# Altium PCB main_old.PcbDoc (part 1 of 15)
Units mil, origin at the board's own origin, x right, y up, seen from the top; angles counter-clockwise.
Board outline 8394.55 x 5164.44 mil, 7 copper layers (Top Layer 1, Layer 2, Layer 3, Unused, Layer 4_pow, Layer 5_gnd, Bottom 6+gnd), stack 46.112 mil thick; 363 components, 409 nets, 1750 pads, 991 vias.
Unrouted connection lines stored in the file: 1.
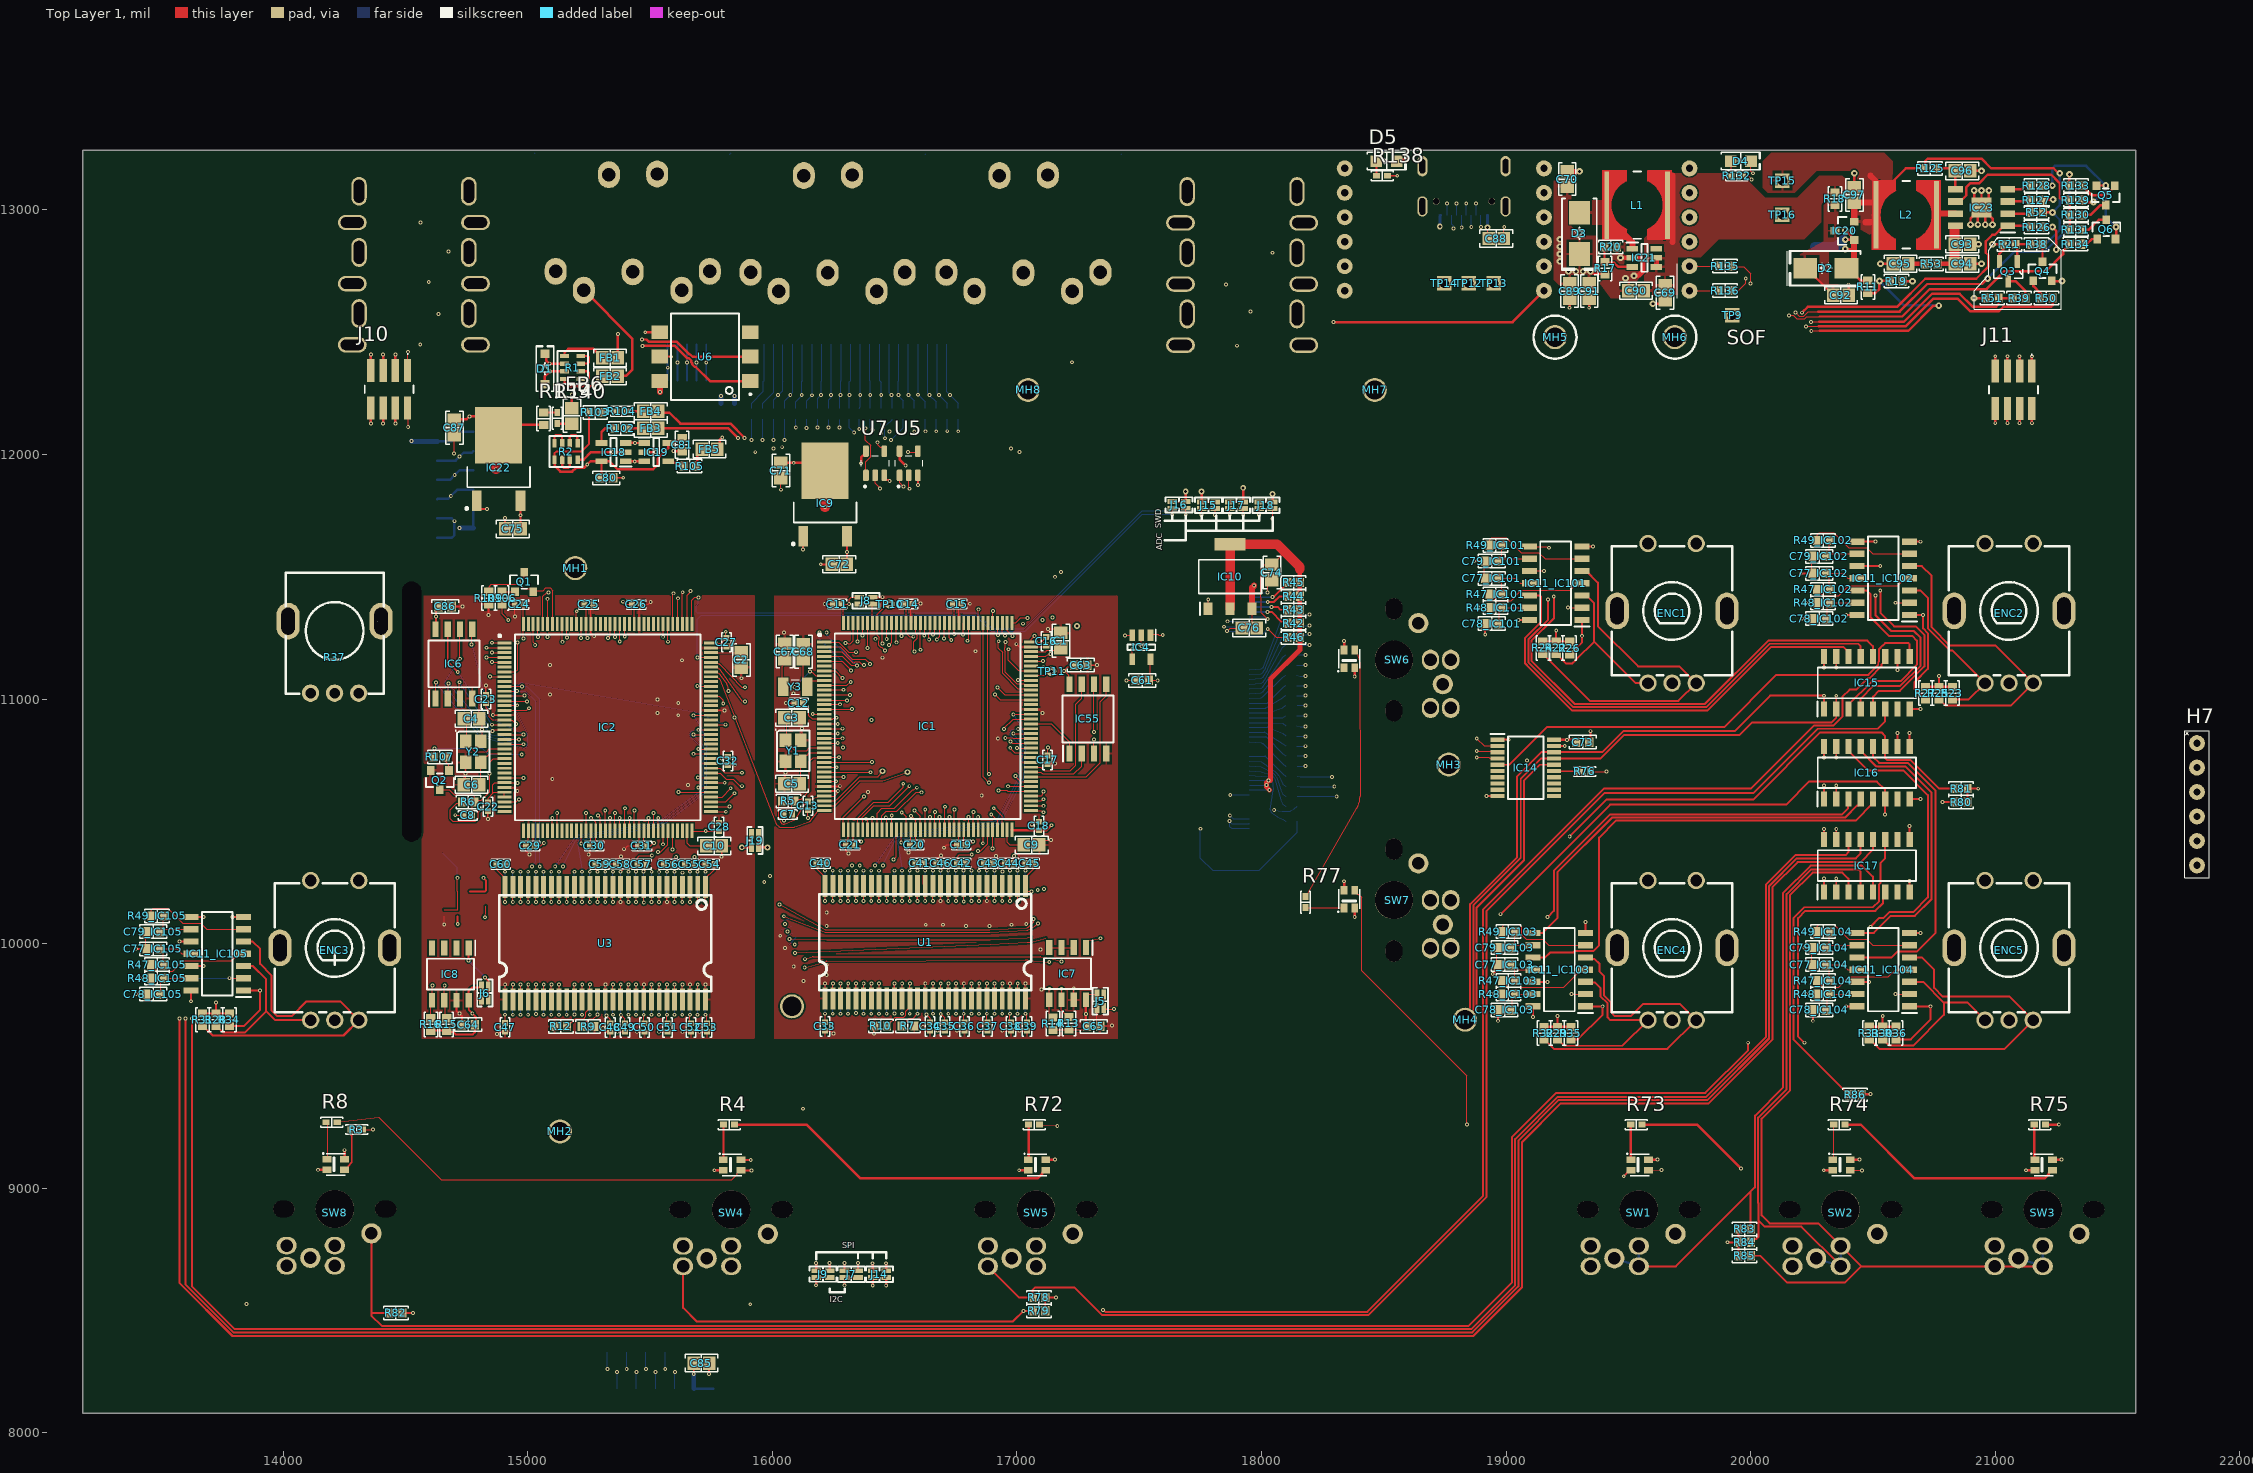
[diagram p0: Top Layer 1 view]
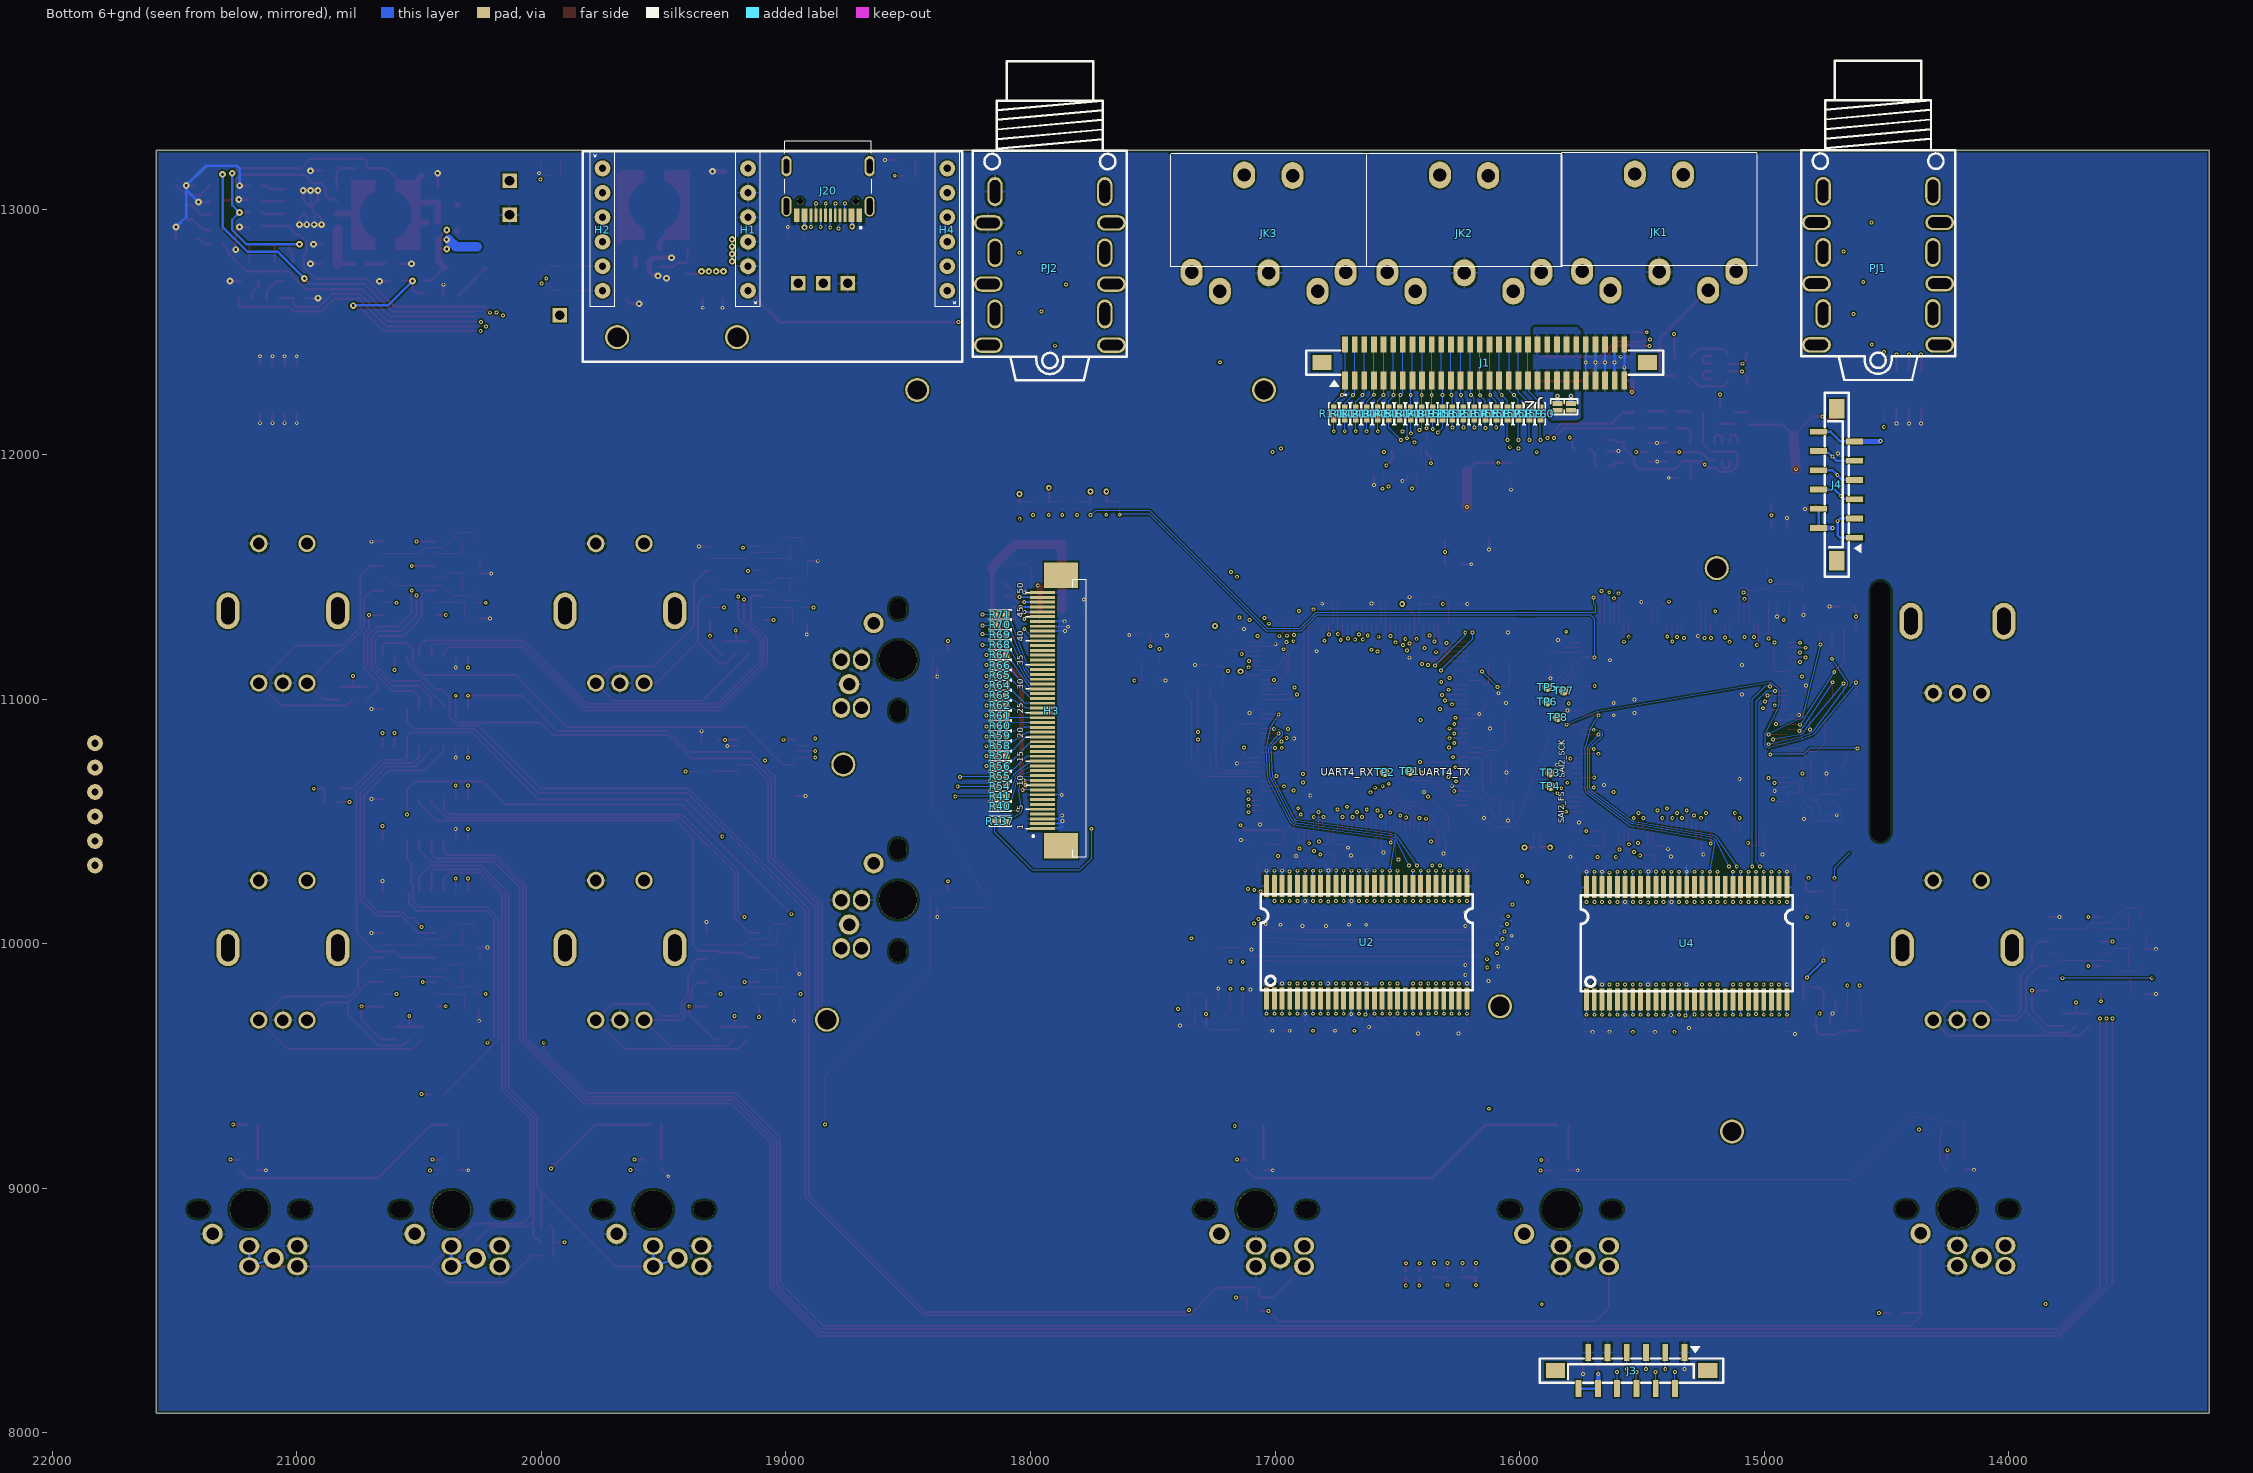
[diagram p1: Bottom 6+gnd view, seen from below]
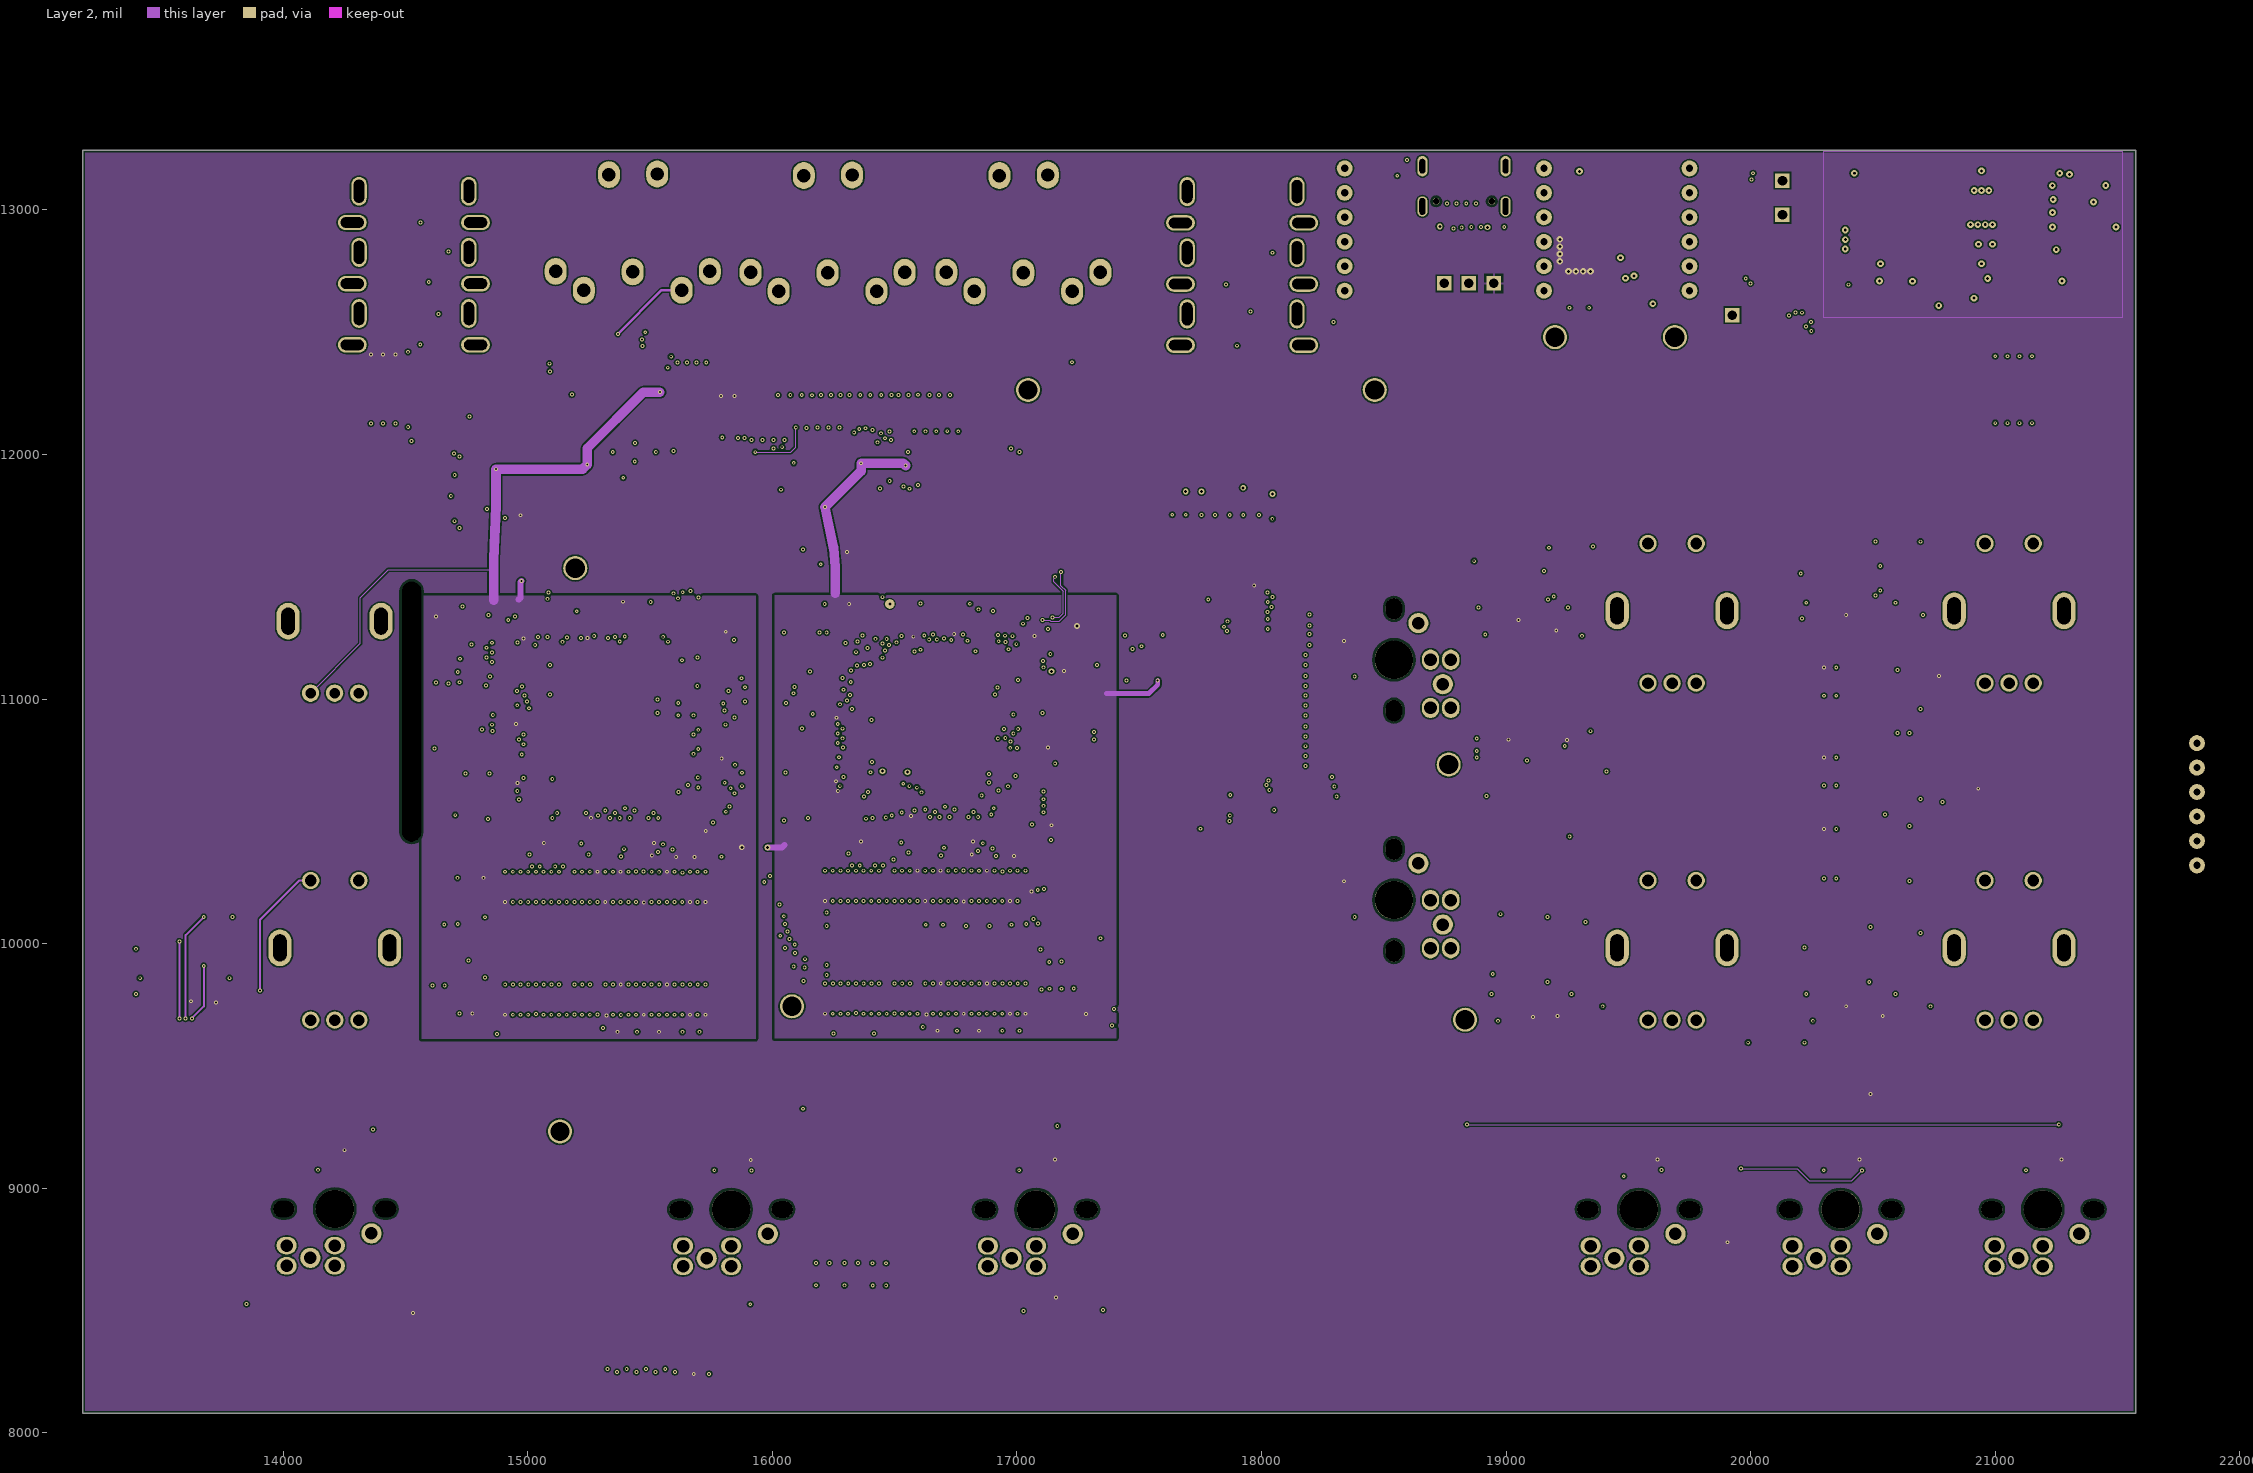
[diagram p2: Layer 2]
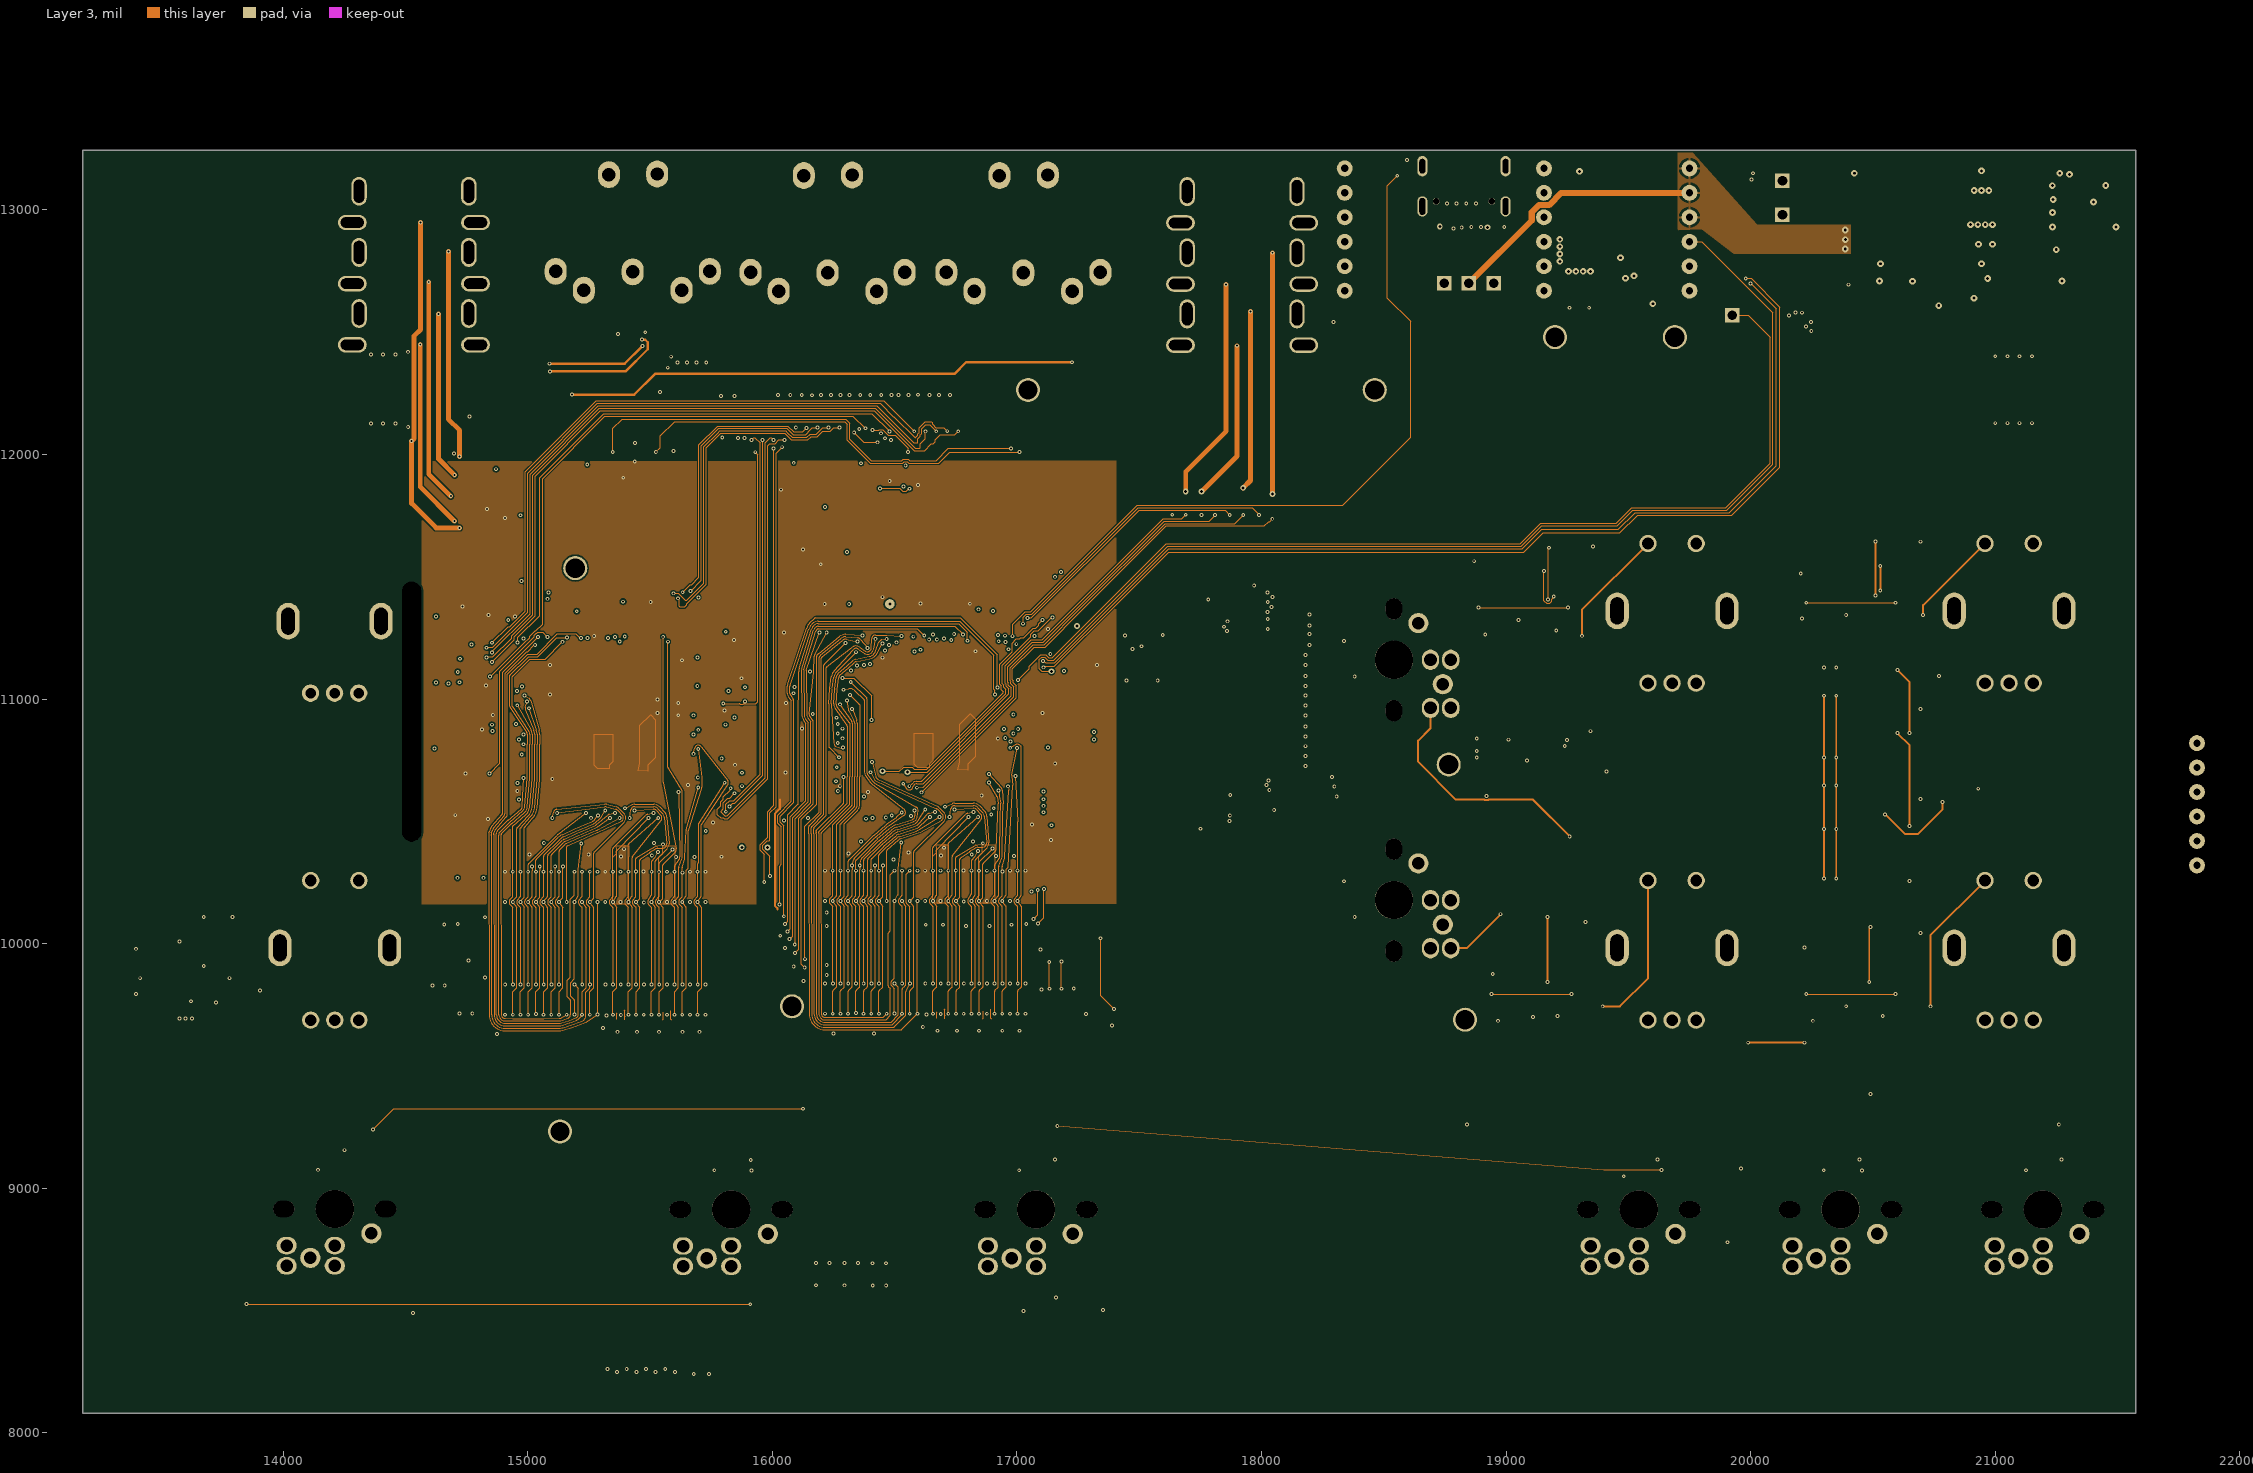
[diagram p3: Layer 3]
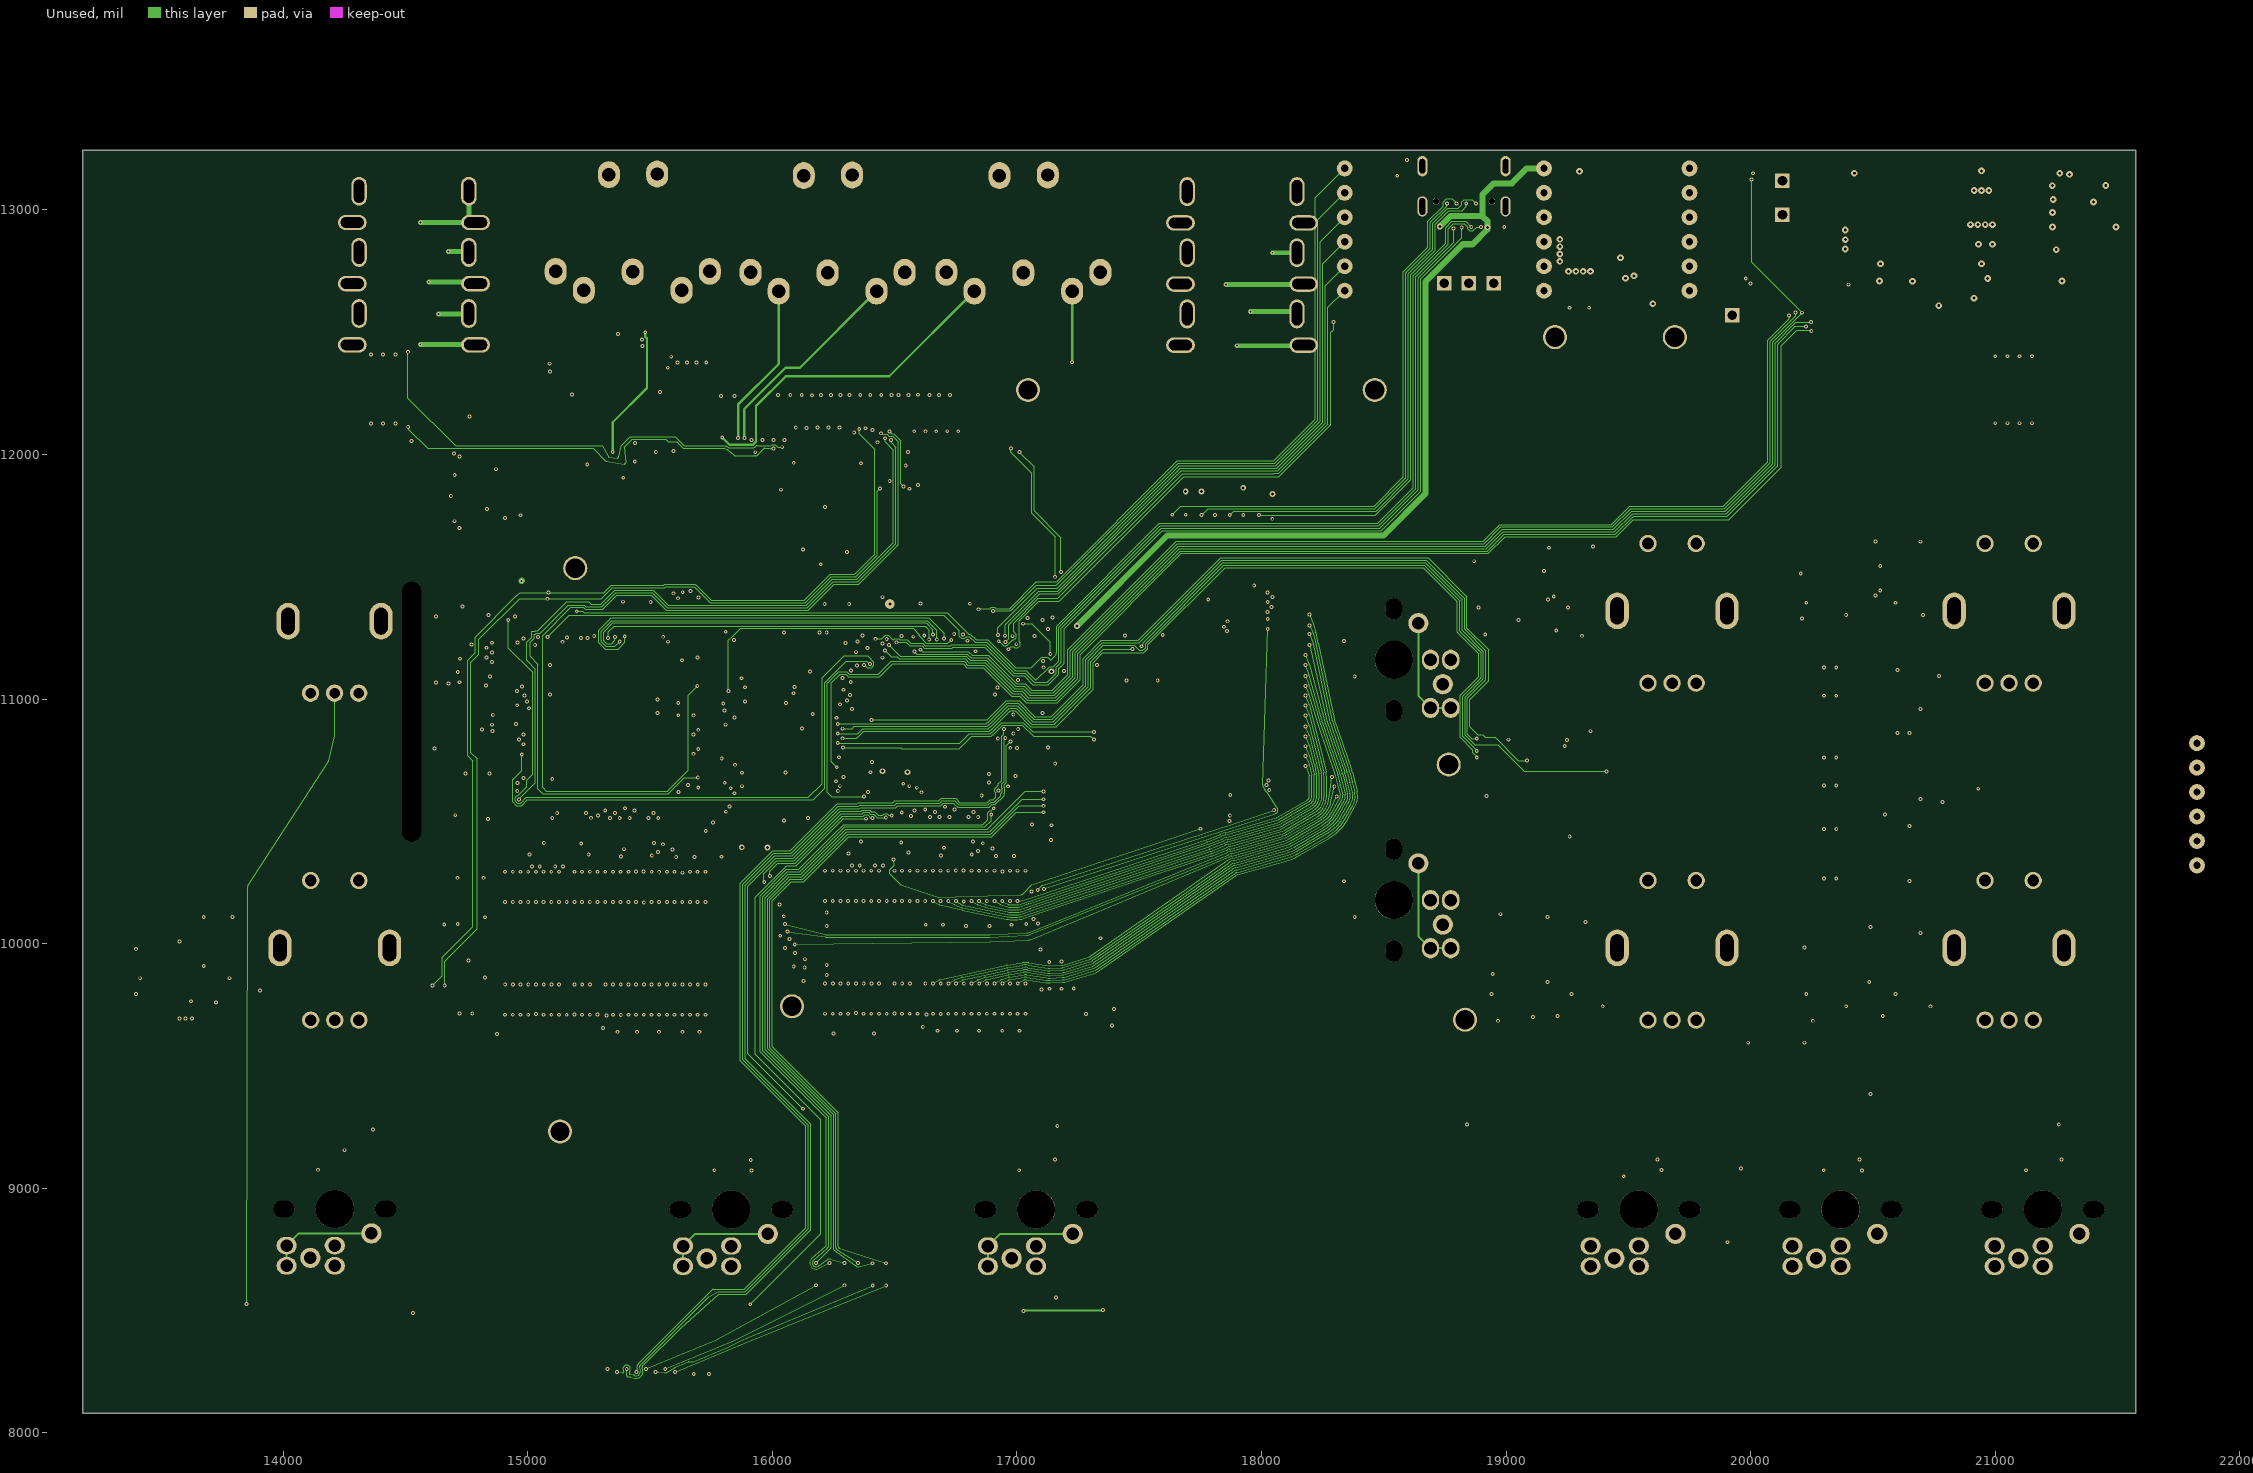
[diagram p4: Unused]
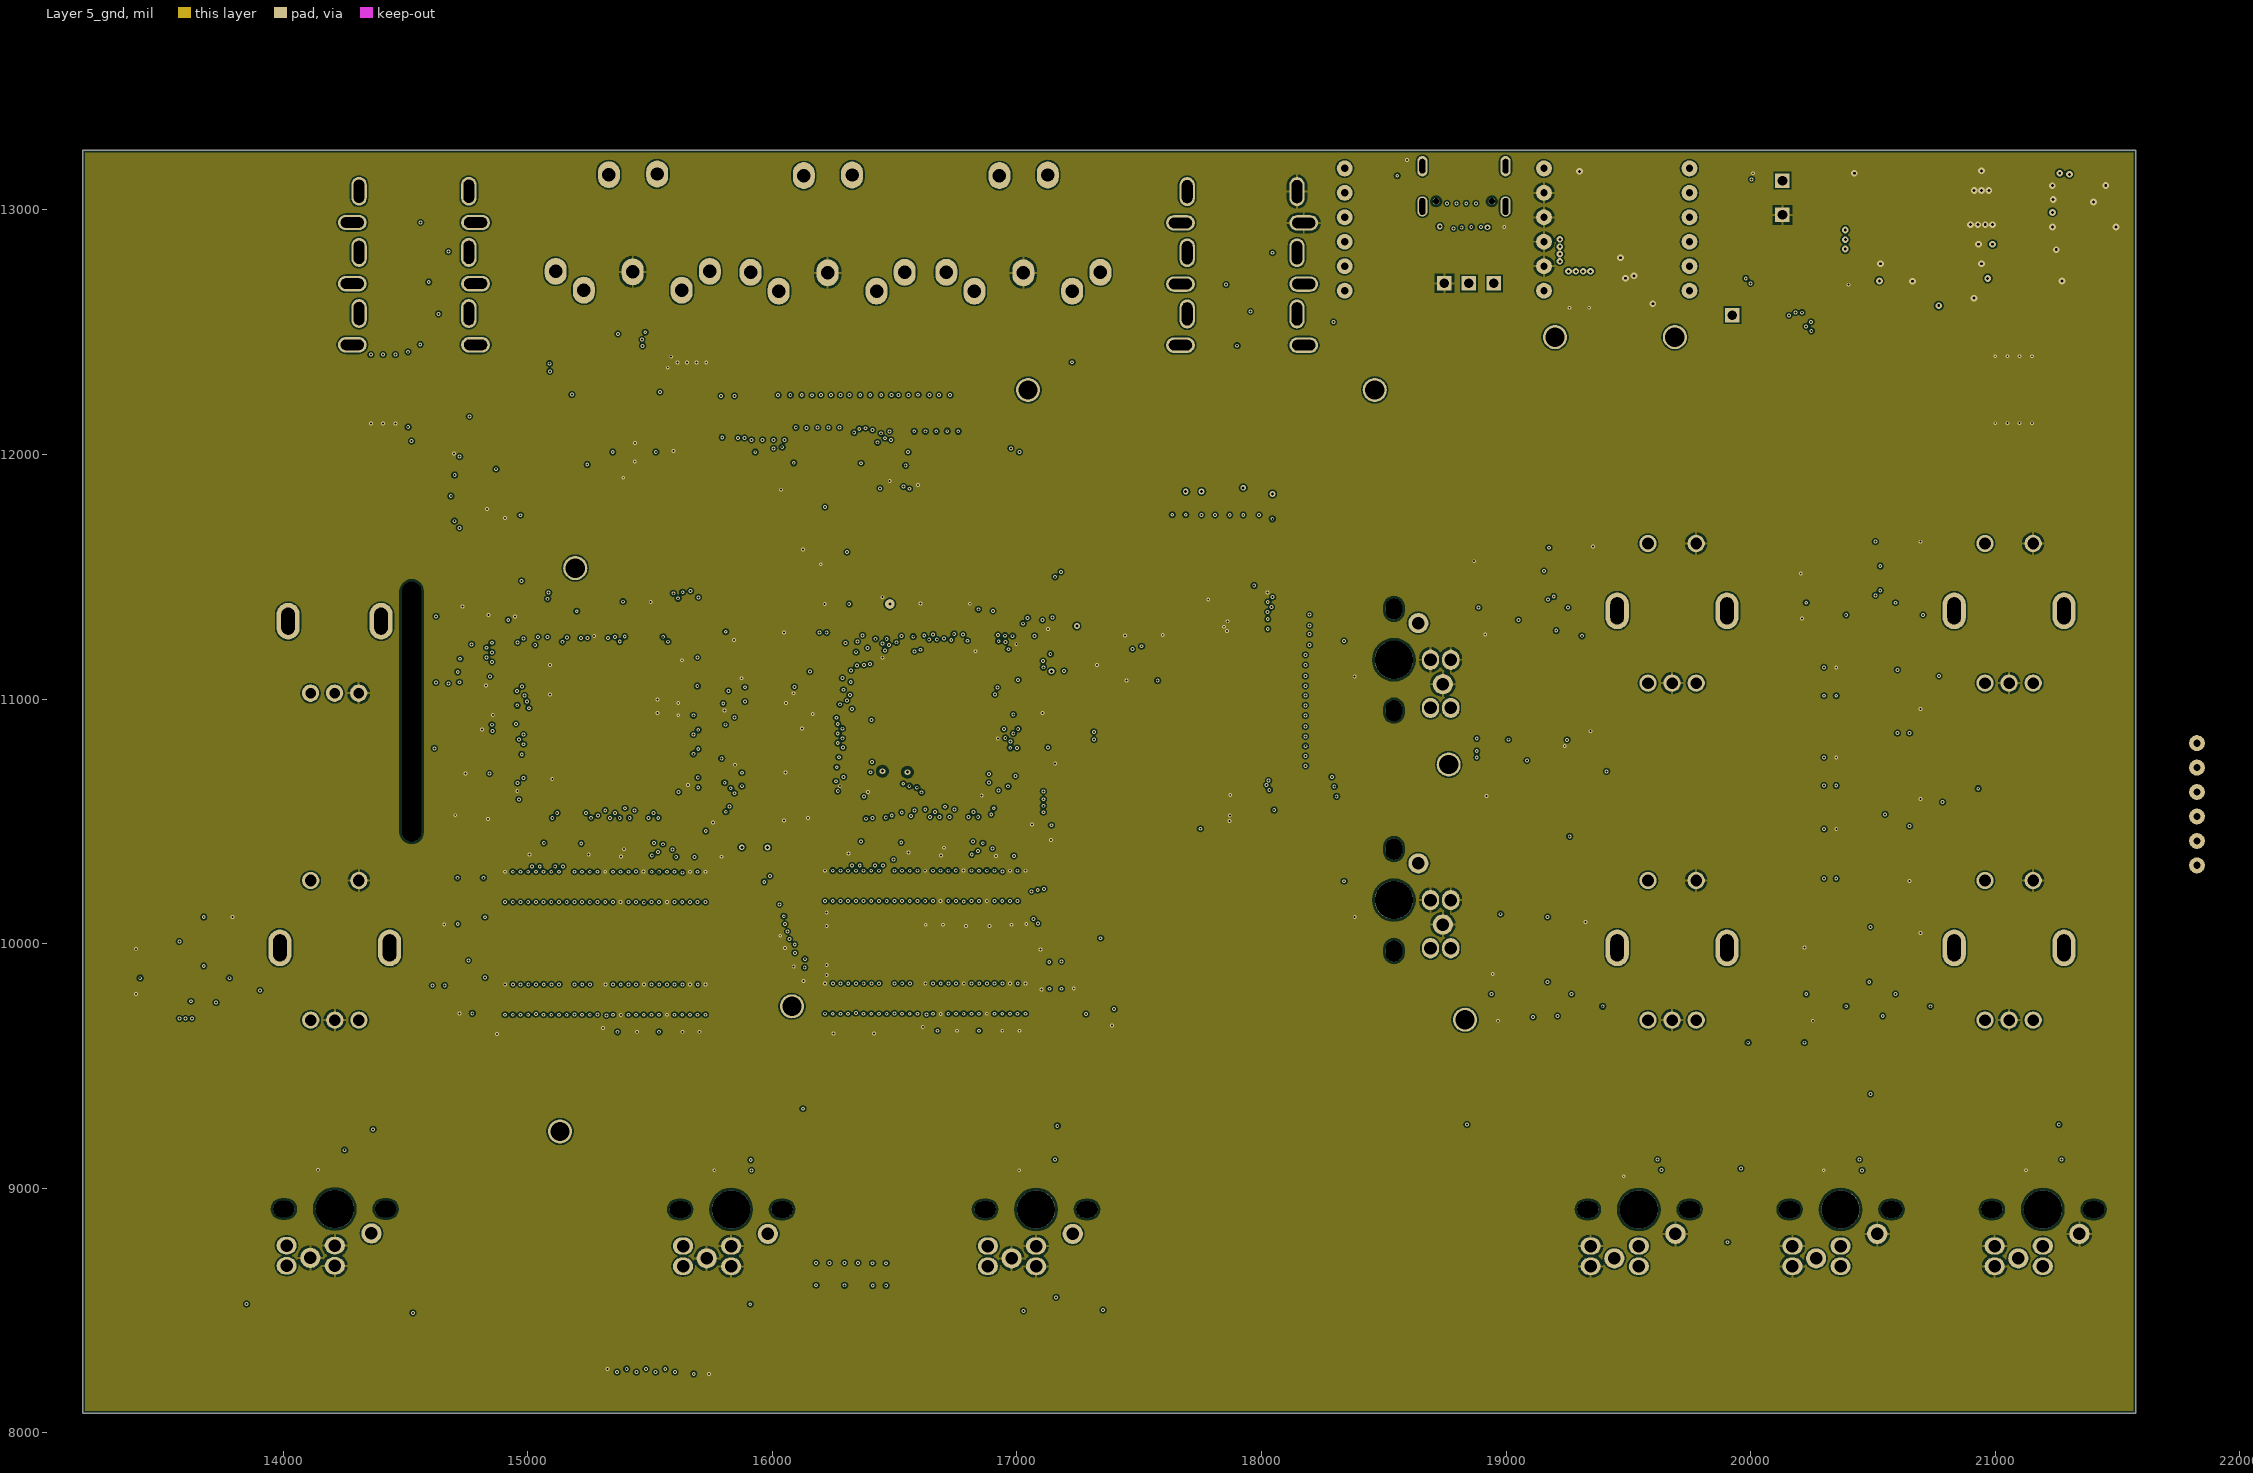
[diagram p5: Layer 5_gnd]

## Layer stack, top to bottom
Top Solder: solder mask 0.4, Solder Resist, Dk 3.5
Top Layer 1: signal copper 1.4
Dielectric 1: dielectric 12.6, FR-4, Dk 4.8
Layer 2: signal copper 1.378
Dielectric 2: prepreg 2.8, PP-006, Dk 4.1
Layer 3: signal copper 1.378
Dielectric 4: prepreg 2.8, PP-006, Dk 4.1
Unused: signal copper 1.4
Dielectric 5: prepreg 2.8, PP-006, Dk 4.1
Layer 4_pow: signal copper 1.378
Dielectric 3: prepreg 2.8, PP-006, Dk 4.1
Layer 5_gnd: signal copper 1.378
Dielectric2: dielectric 12.6, FR-4, Dk 4.8
Bottom 6+gnd: signal copper 1.4
Bottom Solder: solder mask 0.4, Solder Resist, Dk 3.5

## Board outline
13180.25,8079.59 13180.25,13244.04 21574.8,13244.04 21574.8,8670.67 21574.8,8079.59

## Design rules (kind name [scope] priority, off if disabled: settings)
BoardOutlineClearance [All] p1: gap=10 ignorepadtopadclearanceinfootprint=FALSE except(0: Arc-SplitContinuation Track-SplitContinuation SMDPad-SplitContinuation THPad-SplitContinuation Via-SplitContinuation Fill-SplitContinuation Poly-SplitContinuation Region-SplitContinuation Text-SplitContinuation)
Clearance [All] p1: gap=10 ignorepadtopadclearanceinfootprint=TRUE except(5: Arc-Arc Arc-Track Arc-SMDPad Arc-THPad Arc-Via Track-Track Track-SMDPad Track-THPad Track-Via SMDPad-SMDPad SMDPad-THPad SMDPad-Via; 6: Arc-Fill Arc-Poly Arc-Region Track-Fill Track-Poly Track-Region SMDPad-Fill SMDPad-Poly SMDPad-Region THPad-Fill THPad-Poly THPad-Region Via-Fill Via-Poly Via-Region; 7: THPad-Via Text-Text; 7.87: Text-Hole; 8: Arc-Hole Track-Hole SMDPad-Hole; 11: Via-Hole)
ComponentClearance [All] p1 off: gap=10 collisioncheckmode=3 verticalgap=10 showdistances=FALSE
MinimumSolderMaskSliver [All] p1: minsoldermaskwidth=4
PolygonConnect PolygonConnect_2 [All] p1: thpad.connectstyle=Relief thpad.reliefconductorwidth=10 thpad.reliefentries=4 thpad.polygonreliefangle="90 Angle" thpad.airgapwidth=10 smdpad.connectstyle=Relief smdpad.reliefconductorwidth=10 smdpad.reliefentries=4 smdpad.polygonreliefangle="90 Angle" smdpad.airgapwidth=10 via.connectstyle=Direct via.reliefconductorwidth=10 via.reliefentries=4 via.polygonreliefangle="90 Angle" via.airgapwidth=10
PolygonConnect PolygonConnect_1 [All vs InNet('GND')] p2: thpad.connectstyle=Relief thpad.reliefconductorwidth=10 thpad.reliefentries=4 thpad.polygonreliefangle="90 Angle" thpad.airgapwidth=10 smdpad.connectstyle=Relief smdpad.reliefconductorwidth=10 smdpad.reliefentries=4 smdpad.polygonreliefangle="90 Angle" smdpad.airgapwidth=10 via.connectstyle=Direct via.reliefconductorwidth=10 via.reliefentries=4 via.polygonreliefangle="90 Angle" via.airgapwidth=10
PolygonConnect [All vs InNet('+MCU')] p3: thpad.connectstyle=Direct thpad.reliefconductorwidth=10 thpad.reliefentries=4 thpad.polygonreliefangle="90 Angle" thpad.airgapwidth=10 smdpad.connectstyle=Relief smdpad.reliefconductorwidth=10 smdpad.reliefentries=4 smdpad.polygonreliefangle="90 Angle" smdpad.airgapwidth=10 via.connectstyle=Direct via.reliefconductorwidth=10 via.reliefentries=4 via.polygonreliefangle="90 Angle" via.airgapwidth=10
RoomDefinition "LCD FFC" [InComponentClass('LCD FFC')] p1: confinementstyle=ConfineIn formatcopy=TRUE lockcomponents=FALSE outline 0,0 2000,0 2000,1000 0,1000
RoomDefinition 3d_dsn_approx [InComponentClass('3d_dsn_approx')] p2: confinementstyle=ConfineIn formatcopy=TRUE lockcomponents=FALSE outline 0,0 2000,0 2000,1000 0,1000
RoomDefinition IC103 [InComponentClass('IC103')] p3: confinementstyle=ConfineIn formatcopy=TRUE lockcomponents=FALSE outline 18872.72,9678.82 19377.72,9678.82 19377.72,10093.82 18872.72,10093.82
RoomDefinition IC105 [InComponentClass('IC105')] p4: confinementstyle=ConfineIn formatcopy=TRUE lockcomponents=FALSE outline 13385,9743.82 13890,9743.82 13890,10158.82 13385,10158.82
RoomDefinition IC104 [InComponentClass('IC104')] p5: confinementstyle=ConfineIn formatcopy=TRUE lockcomponents=FALSE outline 20197.28,9678.82 20702.28,9678.82 20702.28,10093.82 20197.28,10093.82
RoomDefinition IC102 [InComponentClass('IC102')] p6: confinementstyle=ConfineIn formatcopy=TRUE lockcomponents=FALSE outline 20197.28,11278.82 20702.28,11278.82 20702.28,11693.82 20197.28,11693.82
RoomDefinition IC101 [InComponentClass('IC101')] p7: confinementstyle=ConfineIn formatcopy=TRUE lockcomponents=FALSE outline 18857.72,11258.82 19362.72,11258.82 19362.72,11673.82 18857.72,11673.82
RoutingVias [All] p1: holewidth=7.87 width=15.75 viastyle="Through Hole" minholewidth=7.87 minwidth=15.75 maxholewidth=25 maxwidth=23.62 useviatemplates=TRUE viatemplateguid#1={42022CC5-D0DE-4D84-B667-9158C60BCCDA} viatemplateguid#2={3F1A150C-4AD9-4313-A73C-918DD3CD4B89} viatemplatename#1=v40h20m0mx0 viatemplatename#2=v60h30m0
SilkToSilkClearance [All] p1 off: silktosilkclearance=10
SilkToSolderMaskClearance [IsPad] p1 off: minsilkscreentomaskgap=10 clearancetoexposedcopper=TRUE
SolderMaskExpansion [All] p1: expansion=2 istentingtop=FALSE
Width [All] p1: maxlimit=39.37 minlimit=5 preferedwidth=5
26 further rules are at their usual default settings.

## Classes and differential pairs
component class U_UI: C73 ENC1 ENC2 ENC3 ENC4 ENC5 IC14 IC15 IC16 IC17 R3 R4 R8 R22 R23 R24 R25 R26 R27 R28 R29 R30 R31 R32 R33 R34 R35 R36 R37 R72 R73 R74 R75 R76 R77 R78 R79 R80 R81 R82 R83 R84 R85 R86 SW1 SW2 SW3 SW4 SW5 SW6 SW7 SW8
component class 3d_dsn_approx: D5 H1 H2 H4 H7 J19 MH1 MH2 MH3 MH4 MH5 MH6 MH7 MH8 R135 R136 R138 TP9 TP12 TP13 TP14
component class Power: C69 C70 C89 C90 C91 C92 C93 C94 C95 C96 C97 D2 D3 D4 IC20 IC21 IC23 L1 L2 Q3 Q4 Q5 Q6 R11 R17 R18 R19 R20 R21 R38 R39 R50 R51 R52 R53 R125 R126 R127 R128 R129 R130 R131 R132 R133 R134 TP15 TP16
component class USB_DBG: C88 J20
component class SPI_LSH: C61 IC4
component class MCU_AUDIO: C2 C4 C6 C8 C10 C22 C23 C24 C25 C26 C27 C28 C29 C30 C31 C32 C47 C48 C49 C50 C51 C52 C53 C54 C55 C56 C57 C58 C59 C60 C64 C71 C72 C86 IC2 IC6 IC8 IC9 J6 Q1 Q2 R6 R9 R12 R15 R16 R106 R107 R109 TP3 TP4 TP5 TP6 TP7 TP8 U3 U4 Y2
net class ADC[1..7]: ADC3 ADC4 ADC5 ADC6
component class "Phone Jacks": J4 J15 J16 J17 J18 PJ1 PJ2
component class "MIDI jacks": C80 C81 D1 FB1 FB2 FB3 FB4 FB5 FB6 IC18 IC19 JK1 JK2 JK3 R1 R2 R102 R103 R104 R105 R139 R140 U6
component class FootswConnector: C85 J3 J7 J9 J14
component class "Codec board connector": J1 J2 R141 R142 R143 R144 R145 R146 R147 R148 R149 R150 R151 R152 R153 R154 R155 R156 R157 R158 R159 R160 U5 U7
net class DD[0..15]: DD0 DD1 DD2 DD3 DD4 DD5 DD6 DD7 DD8 DD9 DD10 DD11 DD12 DD13 DD14 DD15
net class AA[0..11]: AA0 AA1 AA2 AA3 AA4 AA5 AA6 AA7 AA8 AA9 AA10 AA11
channel class 74VHCT14AM1: IC101 IC102 IC103 IC104 IC105
net class D[0..15]: D0 D1 D2 D3 D4 D5 D6 D7 D8 D9 D10 D11 D12 D13 D14 D15 D16 D17 D18 D19 D110 D112 D113 D114 D115
net class A[0..11]: A0 A1 A2 A3 A4 A5 A6 A7 A8 A9 A10 A11 A12 A13 A14 A15 A16 A17 A18 A19 A110
component class MCU_GUI: C1 C3 C5 C7 C9 C11 C12 C13 C14 C15 C16 C17 C18 C19 C20 C21 C33 C34 C35 C36 C37 C38 C39 C40 C41 C42 C43 C44 C45 C46 C63 C65 C67 C68 C76 C87 IC1 IC7 IC22 IC55 J5 J8 R5 R7 R10 R13 R14 TP1 TP10 TP11 U1 U2 Y1 Y3
component class IC105: C77_IC105 C78_IC105 C79_IC105 IC11_IC105 R47_IC105 R48_IC105 R49_IC105
component class IC104: C77_IC104 C78_IC104 C79_IC104 IC11_IC104 R47_IC104 R48_IC104 R49_IC104
component class IC103: C77_IC103 C78_IC103 C79_IC103 IC11_IC103 R47_IC103 R48_IC103 R49_IC103
component class IC102: C77_IC102 C78_IC102 C79_IC102 IC11_IC102 R47_IC102 R48_IC102 R49_IC102
component class IC101: C77_IC101 C78_IC101 C79_IC101 IC11_IC101 R47_IC101 R48_IC101 R49_IC101
component class "LCD FFC": C74 C75 H3 IC10 R40 R41 R42 R43 R44 R45 R46 R54 R55 R56 R57 R58 R59 R60 R61 R62 R63 R64 R65 R66 R67 R68 R69 R70 R71 R137 С75
component class U_LOOP_LEDS: J10 J11 VD1

## Components (designator, comment, footprint, x,y, rotation, side; value= is the part's Value field where it differs from the comment)
C1 "2.2 µF" "CAP 0805_2012" 17180,11238.82 r90 top
C2 "2.2 µF" "CAP 0805_2012" 15873.33,11160.26 r270 top
C3 "9pF" "CAP 0805_2012" 16080,10923.82 r180 top
C4 "9pF" "CAP 0805_2012" 14769.65,10919.69 r180 top
C5 "9pF" "CAP 0805_2012" 16080,10653.82 r0 top
C6 "9pF" "CAP 0805_2012" 14770.11,10649.75 r0 top
C7 "0.1µF" "CAP 0402_1005" 16062.68,10528.82 r0 top
C8 "0.1µF" "CAP 0402_1005" 14754.44,10524.63 r0 top
C9 "2.2 µF" "CAP 0805_2012" 17060,10403.82 r180 top
C10 "2.2 µF" "CAP 0805_2012" 15761.76,10399.63 r180 top
C11 "0.1µF" "CAP 0402_1005" 16265,11388.82 r180 top
C12 "0.1µF" "CAP 0402_1005" 16107.68,10983.82 r180 top
C13 "0.1µF" "CAP 0402_1005" 16145.45,10564.1 r270 top
C14 "0.1µF" "CAP 0402_1005" 16555,11388.82 r0 top
C15 "0.1µF" "CAP 0402_1005" 16755,11388.82 r0 top
C16 "0.1µF" "CAP 0402_1005" 17120,11236.14 r270 top
C17 "0.1µF" "CAP 0402_1005" 17125,10751.5 r270 top
C18 "0.1µF" "CAP 0402_1005" 17090,10481.14 r90 top
C19 "0.1µF" "CAP 0402_1005" 16772.58,10403.82 r180 top
C20 "0.1µF" "CAP 0402_1005" 16580,10403.82 r180 top
C21 "0.1µF" "CAP 0402_1005" 16317.68,10403.82 r180 top
C22 "0.1µF" "CAP 0402_1005" 14837.21,10559.91 r270 top
C23 "0.1µF" "CAP 0402_1005" 14828.33,11000.26 r90 top
C24 "0.1µF" "CAP 0402_1005" 14963.92,11386.87 r180 top
C25 "0.1µF" "CAP 0402_1005" 15248.57,11386.87 r0 top
C26 "0.1µF" "CAP 0402_1005" 15443.57,11386.87 r0 top
C27 "0.1µF" "CAP 0402_1005" 15811.76,11231.95 r270 top
C28 "0.1µF" "CAP 0402_1005" 15781.76,10477.31 r90 top
C29 "0.1µF" "CAP 0402_1005" 15009.44,10399.63 r180 top
C30 "0.1µF" "CAP 0402_1005" 15271.76,10399.63 r180 top
C31 "0.1µF" "CAP 0402_1005" 15466.76,10399.63 r180 top
C32 "0.1µF" "CAP 0402_1005" 15817.74,10747.34 r270 top
C33 "0.1µF" "CAP 0402_1005" 16215,9661.5 r270 top
C34 "0.1µF" "CAP 0402_1005" 16645,9661.5 r270 top
C35 "0.1µF" "CAP 0402_1005" 16705,9661.5 r90 top
C36 "0.1µF" "CAP 0402_1005" 16785,9661.5 r270 top
C37 "0.1µF" "CAP 0402_1005" 16880,9661.5 r90 top
C38 "0.1µF" "CAP 0402_1005" 16975,9661.5 r270 top
C39 "0.1µF" "CAP 0402_1005" 17040.39,9661.5 r270 top
C40 "0.1µF" "CAP 0402_1005" 16197.68,10328.82 r0 top
C41 "0.1µF" "CAP 0402_1005" 16602.68,10328.82 r0 top
C42 "0.1µF" "CAP 0402_1005" 16772.68,10328.82 r0 top
C43 "0.1µF" "CAP 0402_1005" 16882.32,10328.82 r0 top
C44 "0.1µF" "CAP 0402_1005" 16967.32,10328.82 r180 top
C45 "0.1µF" "CAP 0402_1005" 17052.32,10328.82 r180 top
C46 "0.1µF" "CAP 0402_1005" 16687.68,10328.82 r180 top
C47 "0.1µF" "CAP 0402_1005" 14907.18,9657.73 r270 top
C48 "0.1µF" "CAP 0402_1005" 15336.76,9657.31 r270 top
C49 "0.1µF" "CAP 0402_1005" 15396.76,9657.31 r90 top
C50 "0.1µF" "CAP 0402_1005" 15476.76,9657.31 r270 top
C51 "0.1µF" "CAP 0402_1005" 15571.76,9657.31 r90 top
C52 "0.1µF" "CAP 0402_1005" 15666.76,9657.31 r270 top
C53 "0.1µF" "CAP 0402_1005" 15732.15,9657.31 r270 top
C54 "0.1µF" "CAP 0402_1005" 15744.08,10324.63 r180 top
C55 "0.1µF" "CAP 0402_1005" 15659.08,10324.63 r180 top
C56 "0.1µF" "CAP 0402_1005" 15574.08,10324.63 r180 top
C57 "0.1µF" "CAP 0402_1005" 15464.44,10324.63 r0 top
C58 "0.1µF" "CAP 0402_1005" 15378.33,10325.26 r180 top
C59 "0.1µF" "CAP 0402_1005" 15294.38,10324.63 r0 top
C60 "0.1µF" "CAP 0402_1005" 14889.44,10324.63 r0 top
C61 "0.1 µF" "CAP 0603_1608" 17511.89,11076.73 r180 top
C63 "0.1 µF" "CAP 0603_1608" 17261.5,11138.82 r180 top
C64 "0.1 µF" "CAP 0603_1608" 14756.57,9668.82 r0 top
C65 "0.1 µF" "CAP 0603_1608" 17313.58,9662.2 r180 top
C67 "7 pF" "CAP 0805_2012" 16050.36,11194.34 r270 top
C68 "7 pF" "CAP 0805_2012" 16127.09,11193.7 r270 top
C69 "1 µF" "CAP 0805_2012" 19650,12661.5 r90 top
C70 "1 µF" "CAP 0805_2012" 19249.81,13126.49 r270 top
C71 "10 µF" "CAP 0805_2012" 16035,11934.69 r90 top
C72 "1 µF" "CAP 0805_2012" 16273.5,11551.18 r0 top
C73 "0.1 µF" "CAP 0603_1608" 19313.5,10823.82 r180 top
C74 "10 µF" "CAP 0805_2012" 18042.4,11517.21 r90 top
C75 "1 µF" "CAP 0805_2012" 14938.5,11696.18 r0 top
C76 "1 µF" "CAP 0805_2012" 17949.92,11290.71 r0 top
C77_IC101 "0.1 µF" "CAP 0603_1608" 18941.22,11493.82 r180 top (schematic designator C77)
C77_IC102 "0.1 µF" "CAP 0603_1608" 20280.79,11513.82 r180 top (schematic designator C77)
C77_IC103 "0.1 µF" "CAP 0603_1608" 18993.5,9913.82 r180 top (schematic designator C77)
C77_IC104 "0.1 µF" "CAP 0603_1608" 20280.79,9913.82 r180 top (schematic designator C77)
C77_IC105 "0.1 µF" "CAP 0603_1608" 13468.5,9978.82 r180 top (schematic designator C77)
C78_IC101 "0.1 µF" "CAP 0603_1608" 18941.22,11308.82 r180 top (schematic designator C78)
C78_IC102 "0.1 µF" "CAP 0603_1608" 20280.79,11328.82 r180 top (schematic designator C78)
C78_IC103 "0.1 µF" "CAP 0603_1608" 18993.5,9728.82 r180 top (schematic designator C78)
C78_IC104 "0.1 µF" "CAP 0603_1608" 20280.79,9728.82 r180 top (schematic designator C78)
C78_IC105 "0.1 µF" "CAP 0603_1608" 13468.5,9793.82 r180 top (schematic designator C78)
C79_IC101 "0.1 µF" "CAP 0603_1608" 18941.22,11563.82 r180 top (schematic designator C79)
C79_IC102 "0.1 µF" "CAP 0603_1608" 20280.79,11583.82 r180 top (schematic designator C79)
C79_IC103 "0.1 µF" "CAP 0603_1608" 18993.5,9983.82 r180 top (schematic designator C79)
C79_IC104 "0.1 µF" "CAP 0603_1608" 20280.79,9983.82 r180 top (schematic designator C79)
C79_IC105 "0.1 µF" "CAP 0603_1608" 13468.5,10048.82 r180 top (schematic designator C79)
C80 "0.1 µF" "CAP 0603_1608" 15321.57,11905 r0 top
C81 "0.1 µF" "CAP 0603_1608" 15631.2,12040.53 r270 top
C85 "10 µF" "CAP 0805_2012" 15710,8285 r180 top
C86 "0.1 µF" "CAP 0603_1608" 14661.5,11378.82 r180 top
C87 "10 µF" "CAP 0805_2012" 14700,12109.69 r90 top
C88 "10 µF" "CAP 0805_2012" 18959.61,12883.31 r180 top
C89 "1 µF" "CAP 0805_2012" 19259.81,12668.5 r90 top
C90 "22 µF" "CAP 0805_2012" 19531.31,12669.99 r0 top
C91 "22 µF" "CAP 0805_2012" 19339.81,12668.5 r90 top
C92 "10 µF" "CAP 0805_2012" 20369.02,12650.98 r180 top
C93 "10 µF" "CAP 0805_2012" 20865.51,12860 r180 top
C94 "22 µF" "CAP 0805_2012" 20865.51,12780 r180 top
C95 "10 µF" "CAP 0805_2012" 20612.52,12780 r0 top
C96 "22 µF" "CAP 0805_2012" 20865.51,13160 r180 top
C97 "22 µF" "CAP 0805_2012" 20424.02,13061.5 r270 top
D1 "1N4148W-TP" SOD-123 15070,12350 r90 top
D2 "SS24" "DO214AA SMB" 20307.37,12762.1 r180 top
D3 "SS24" "DO214AA SMB" 19299.81,12904.64 r270 top
D4 "Red" "LED 0805_2012 RED" 19960,13200 r0 top
D5 "Red" "LED 0805_2012 RED" 18511.34,13200 r0 top
ENC1 "Encoder_15mm" EC11_15mm 19678.75,11360.55 r0 top
ENC2 "Encoder_15mm" EC11_15mm 21056.7,11360.55 r0 top
ENC3 "Encoder_15mm" EC11_15mm 14210.63,9982.6 r0 top
ENC4 "Encoder_15mm" EC11_15mm 19678.75,9982.6 r0 top
ENC5 "Encoder_15mm" EC11_15mm 21056.7,9982.6 r0 top
FB1 "220 Ohms @ 100 MHz" "FER 0805_2012" 15336.5,12395 r180 top
FB2 "220 Ohms @ 100 MHz" "FER 0805_2012" 15336.5,12320 r180 top
FB3 "220 Ohms @ 100 MHz" "FER 0805_2012" 15502.7,12107.11 r0 top
FB4 "220 Ohms @ 100 MHz" "FER 0805_2012" 15502.7,12177.11 r0 top
FB5 "220 Ohms @ 100 MHz" "FER 0805_2012" 15742.7,12022.31 r0 top
FB6 "220 Ohms @ 100 MHz" "FER 0805_2012" 15180,12158.31 r90 top
H1 "arduino_header_6" header-6_female 19154.81,12669.99 r90 bottom
H2 "arduino_header_6" header-6_female 19749.81,13169.99 r270 bottom
H3 "FFC_50_DBG" FFC_50_DBG 17861.42,10805.71 r90 bottom
H4 "arduino_header_6" header-6_female 18340,12670 r90 bottom
H7 "LED_RGB" header-6_male 21825,10820 r270 top
IC1 "STM32H743ZIT6U" QFP50P2200X2200X160-144N 16635,10888.82 r0 top
IC2 "STM32H743ZIT6U" QFP50P2200X2200X160-144N 15326.76,10884.63 r0 top
IC4 "SN74LVC1G125DBVR" SOT95P280X145-5N#1 17508.39,11211.73 r270 top
IC6 "N25Q128A13ESE40F" SOIC127P790X216-8N 14697.62,11143.9 r90 top
IC7 "AT24C128BN-SH-B" SOIC127P600X175-8N 17207.09,9877.2 r270 top
IC8 "AT24C128BN-SH-B" SOIC127P600X175-8N 14683.33,9875.26 r270 top
IC9 "LD1117DT33TR" TO228P972X240-3N 16215.24,11837.44 r90 top
IC10 "ams1117-3.3v" SOT-223 17871.42,11500.71 r90 top
IC11_IC101 "74VHCT14AM" SOIC127P600X175-14N 19202.72,11473.82 r180 top (schematic designator IC11)
IC11_IC102 "74VHCT14AM" SOIC127P600X175-14N 20542.28,11493.82 r180 top (schematic designator IC11)
IC11_IC103 "74VHCT14AM" SOIC127P600X175-14N 19217.72,9893.82 r180 top (schematic designator IC11)
IC11_IC104 "74VHCT14AM" SOIC127P600X175-14N 20542.28,9893.82 r180 top (schematic designator IC11)
IC11_IC105 "74VHCT14AM" SOIC127P600X175-14N 13730,9958.82 r180 top (schematic designator IC11)
IC14 "SN74HC245PWR" SOP65P640X120-20N 19080,10718.82 r0 top
IC15 "74HC165D_BJ_" SOIC127P600X175-16N 20475,11066.53 r90 top
IC16 "74HC165D_BJ_" SOIC127P600X175-16N 20475,10698.82 r90 top
IC17 "74HC165D_BJ_" SOIC127P600X175-16N 20475,10318.82 r90 top
IC18 "SN74LVC1G125DBVR" SOT95P280X145-5N#1 15350.41,12009.71 r180 top
IC19 "SN74LVC1G125DBVR" SOT95P280X145-5N#1 15525.41,12009.71 r0 top
IC20 "DMP1045U-7" "DIODES SOT-23-3" 20384.02,12915 r180 top
IC21 "MT3608" SOT95P280X145-6N 19565.6,12804.4 r0 top
IC22 "LD1117DT33TR" TO228P972X240-3N 14880.24,11982.44 r90 top
IC23 "IP2312" SOIC127P600X165-9N 20944.02,13010 r180 top
IC55 "N25Q128A13ESE40F" SOIC127P790X216-8N 17290,10918.82 r90 top
J1 "3-1734248-0" 317342480 16142.83,12362.4 r0 bottom
J2 "" "CON: JUMPER x2"#1 15790,12195 r90 bottom
J3 "0528081271" AFA11-S12GLA-00 15325.65,8328.46 r0 bottom
J4 "0528081271" AFA11-S12GLA-00 14630,11660 r90 bottom
J5 "" "CON: JUMPER x2"#2 17340.87,9737.09 r0 top
J6 "" "CON: JUMPER x2"#2 14824.55,9770.14 r0 top
J7 "" "CON: JUMPER x2"#1 16350,8648.82 r90 top
J8 "" "CON: JUMPER x2"#3 16354.88,11402.6 r90 top
J9 "" "CON: JUMPER x2"#3 16178.66,8648.94 r90 top
J10 "20021121-00008T4LF" 2002112100008T4LF 14433.32,12267.37 r180 top
J11 "20021121-00008T4LF" 2002112100008T4LF 21075,12265 r180 top
J14 "" "CON: JUMPER x2"#1 16465.12,8648.82 r90 top
J15 "" "CON: JUMPER x2"#1 17810.12,11792.6 r90 top
J16 "" "CON: JUMPER x2"#1 17690,11793.82 r90 top
J17 "" "CON: JUMPER x2"#1 17925.12,11792.6 r90 top
J18 "" "CON: JUMPER x2"#1 18045.12,11792.6 r90 top
J19 "" "CON: JUMPER x2"#1 15928.78,10393.82 r0 top
J20 "TYPE-C-31-M-12" "HRO_TYPE-C-31-M-12 - REZONIT" 18827.81,13178.99 r0 bottom
JK1 "MIDI_IN" DIN5 15428.93,12947 r180 bottom
JK2 "MIDI_THRU" DIN5 16225.93,12943 r180 bottom
JK3 "MIDI_OUT" DIN5 17025.93,12943 r180 bottom
L1 "3.3 µH" "BOURNS SRR6028" 19535.79,13019.99 r180 top
L2 "3.3 µH" "BOURNS SRR6028" 20635.98,12980 r180 top
MH1 "MountingHole" Hole_2.5mm#1 15193.93,11535.48 r0 top
MH2 "MountingHole" Hole_2.5mm#1 15131.49,9232.33 r0 top
MH3 "MountingHole" Hole_2.5mm#1 18765.35,10732.33 r0 top
MH4 "MountingHole" Hole_2.5mm#1 18832.28,9689.03 r0 top
MH5 "MountingHole" Hole_2.5mm#1 19200,12480 r0 top
MH6 "MountingHole" Hole_2.5mm#1 19690,12480 r0 top
MH7 "MountingHole" Hole_2.5mm#2 18462.85,12264.14 r0 top
MH8 "MountingHole" Hole_2.5mm#1 17045.52,12264.14 r0 top
PJ1 "PJ-625DK" PJ-625CK 14534.27,12762.55 r270 bottom
PJ2 "PJ-625DK" PJ-625CK 17920.59,12761.05 r270 bottom
Q1 "MMBT3904-7-F" "DIODES SOT-23-3" 14985,11478.82 r90 top
Q2 "MMBT3904-7-F" "DIODES SOT-23-3" 14640,10668.82 r270 top
Q3 "3906" SOT-23 21053.39,12749.37 r270 top
Q4 "MMBT3904-7-F" "DIODES SOT-23-3" 21193.39,12749.37 r90 top
Q5 "MMBT3904-7-F" "DIODES SOT-23-3" 21451.89,13059.37 r270 top
Q6 "MMBT3904-7-F" "DIODES SOT-23-3" 21454.02,12920.63 r90 top
R1 "YC164-JR-07100RL" "RESNET 1206-8 CONVEX" 15183.46,12355.75 r180 top
R2 "YC164-JR-07100RL" "RESNET 1206-8 CONVEX" 15156.2,12012.11 r90 top
R3 "100 Ohms" "RES 0402_1005" 14300,9240 r0 top
R4 "100 Ohms" "RES 0402_1005" 15822.64,9260 r180 top
R5 "10 kOhms" "RES 0603_1608" 16065,10583.82 r0 top
R6 "10 kOhms" "RES 0603_1608" 14756.76,10579.63 r0 top
R7 "10 kOhms" "RES 0603_1608" 16554.41,9663.82 r180 top
R8 "100 Ohms" "RES 0402_1005" 14197.64,9270 r180 top
R9 "10 kOhms" "RES 0603_1608" 15246.17,9660.61 r180 top
R10 "10 kOhms" "RES 0603_1608" 16443.23,9663.82 r0 top
R11 "10 kOhms" "RES 0603_1608" 20479.02,12685.59 r90 top
R12 "10 kOhms" "RES 0603_1608" 15134.99,9661.6 r0 top
R13 "5.6 kOhms" "RES 0603_1608" 17212.09,9674.02 r270 top
R14 "5.6 kOhms" "RES 0603_1608" 17147.09,9672.8 r270 top
R15 "5.6 kOhms" "RES 0603_1608" 14668.33,9669.67 r270 top
R16 "5.6 kOhms" "RES 0603_1608" 14603.33,9669.67 r270 top
R17 "10 kOhms" "RES 0603_1608" 19405.04,12761.58 r270 top
R18 "Value" "RES 0603_1608" 20344.33,13045.28 r270 top
R19 "10 kOhms" "RES 0603_1608" 20595.88,12708.73 r180 top
R20 "1 kOhms" "RES 0603_1608" 19427.87,12848.61 r180 top
R21 "10 kOhms" "RES 0603_1608" 21057.8,12859.37 r180 top
R22 "10 kOhms" "RES 0603_1608" 19205,11209.41 r90 top
R23 "10 kOhms" "RES 0603_1608" 20825,11024.41 r90 top
R24 "10 kOhms" "RES 0603_1608" 19150,11209.41 r90 top
R25 "10 kOhms" "RES 0603_1608" 20770,11024.41 r90 top
R26 "10 kOhms" "RES 0603_1608" 19260,11208.82 r90 top
R27 "10 kOhms" "RES 0603_1608" 20715,11024.41 r90 top
R28 "10 kOhms" "RES 0603_1608" 13725,9688.82 r90 top
R29 "10 kOhms" "RES 0603_1608" 19210,9633.82 r90 top
R30 "10 kOhms" "RES 0603_1608" 20540,9634.41 r90 top
R31 "10 kOhms" "RES 0603_1608" 13670,9688.82 r90 top
R32 "10 kOhms" "RES 0603_1608" 19155,9633.82 r90 top
R33 "10 kOhms" "RES 0603_1608" 20485,9634.41 r90 top
R34 "10 kOhms" "RES 0603_1608" 13780,9688.82 r90 top
R35 "10 kOhms" "RES 0603_1608" 19265,9633.82 r90 top
R36 "10 kOhms" "RES 0603_1608" 20595,9634.41 r90 top
R37 "100k" POT 14210,11248.82 r0 top
R38 "10 kOhms" "RES 0603_1608" 21168.98,12859.37 r180 top
R39 "7.5 kOhms" "RES 0603_1608" 21097.79,12639.37 r0 top
R40 "22 Ohms" "RES 0402_1005" 18122.64,10560.87 r0 bottom
R41 "22 Ohms" "RES 0402_1005" 18122.64,10602.19 r0 bottom
R42 "10 Ohms" "RES 0603_1608" 18131.01,11310.32 r0 top
R43 "10 Ohms" "RES 0603_1608" 18131.01,11365.32 r0 top
R44 "10 Ohms" "RES 0603_1608" 18131.01,11420.32 r0 top
R45 "10 Ohms" "RES 0603_1608" 18131.01,11476.98 r0 top
R46 "10 kOhms" "RES 0603_1608" 18131.01,11251.98 r0 top
R47_IC101 "10 kOhms" "RES 0603_1608" 18957.13,11428.82 r0 top (schematic designator R47)
R47_IC102 "10 kOhms" "RES 0603_1608" 20296.69,11448.82 r0 top (schematic designator R47)
R47_IC103 "10 kOhms" "RES 0603_1608" 19009.41,9848.82 r0 top (schematic designator R47)
R47_IC104 "10 kOhms" "RES 0603_1608" 20296.69,9848.82 r0 top (schematic designator R47)
R47_IC105 "10 kOhms" "RES 0603_1608" 13484.41,9913.82 r0 top (schematic designator R47)
R48_IC101 "10 kOhms" "RES 0603_1608" 18957.13,11373.82 r0 top (schematic designator R48)
R48_IC102 "10 kOhms" "RES 0603_1608" 20296.69,11393.82 r0 top (schematic designator R48)
R48_IC103 "10 kOhms" "RES 0603_1608" 19009.41,9793.82 r0 top (schematic designator R48)
R48_IC104 "10 kOhms" "RES 0603_1608" 20296.69,9793.82 r0 top (schematic designator R48)
R48_IC105 "10 kOhms" "RES 0603_1608" 13484.41,9858.82 r0 top (schematic designator R48)
R49_IC101 "10 kOhms" "RES 0603_1608" 18957.13,11628.82 r0 top (schematic designator R49)
R49_IC102 "10 kOhms" "RES 0603_1608" 20296.69,11648.82 r0 top (schematic designator R49)
R49_IC103 "10 kOhms" "RES 0603_1608" 19009.41,10048.82 r0 top (schematic designator R49)
R49_IC104 "10 kOhms" "RES 0603_1608" 20296.69,10048.82 r0 top (schematic designator R49)
R49_IC105 "10 kOhms" "RES 0603_1608" 13484.41,10113.82 r0 top (schematic designator R49)
R50 "10 kOhms" "RES 0603_1608" 21208.98,12639.37 r0 top
R51 "2.7 kOhms" "RES 0603_1608" 20987.8,12639.37 r0 top
R52 "1 kOhms" "RES 0603_1608" 21169.61,12990 r0 top
R53 "2 Ohms" "RES 0603_1608" 20738.42,12780 r0 top
R54 "22 Ohms" "RES 0402_1005" 18122.64,10643.5 r0 bottom
R55 "22 Ohms" "RES 0402_1005" 18122.64,10684.82 r0 bottom
R56 "22 Ohms" "RES 0402_1005" 18122.64,10726.14 r0 bottom
R57 "22 Ohms" "RES 0402_1005" 18122.64,10767.45 r0 bottom
R58 "22 Ohms" "RES 0402_1005" 18122.64,10808.77 r0 bottom
R59 "22 Ohms" "RES 0402_1005" 18122.64,10850.08 r0 bottom
R60 "22 Ohms" "RES 0402_1005" 18122.64,10891.4 r0 bottom
R61 "22 Ohms" "RES 0402_1005" 18122.64,10932.71 r0 bottom
R62 "22 Ohms" "RES 0402_1005" 18122.64,10974.03 r0 bottom
R63 "22 Ohms" "RES 0402_1005" 18122.64,11015.35 r0 bottom
R64 "22 Ohms" "RES 0402_1005" 18122.64,11056.66 r0 bottom
R65 "22 Ohms" "RES 0402_1005" 18122.64,11097.98 r0 bottom
R66 "22 Ohms" "RES 0402_1005" 18122.64,11139.29 r0 bottom
R67 "22 Ohms" "RES 0402_1005" 18122.64,11180.61 r0 bottom
R68 "22 Ohms" "RES 0402_1005" 18122.64,11221.92 r0 bottom
R69 "22 Ohms" "RES 0402_1005" 18122.64,11263.24 r0 bottom
R70 "22 Ohms" "RES 0402_1005" 18122.64,11304.56 r0 bottom
R71 "22 Ohms" "RES 0402_1005" 18122.64,11345.87 r0 bottom
R72 "100 Ohms" "RES 0402_1005" 17070,9260 r180 top
R73 "100 Ohms" "RES 0402_1005" 19532.64,9260 r180 top
R74 "100 Ohms" "RES 0402_1005" 20362.64,9260 r180 top
R75 "100 Ohms" "RES 0402_1005" 21182.64,9260 r180 top
R76 "100 Ohms" "RES 0402_1005" 19322.08,10704.37 r180 top
R77 "100 Ohms" "RES 0402_1005" 18180,10170 r270 top
R78 "10 kOhms" "RES 0603_1608" 17090,8553.82 r0 top
R79 "10 kOhms" "RES 0603_1608" 17090,8498.82 r0 top
R80 "10 kOhms" "RES 0603_1608" 20860.59,10578.82 r0 top
R81 "10 kOhms" "RES 0603_1608" 20860.59,10633.82 r0 top
R82 "10 kOhms" "RES 0603_1608" 14460.59,8490 r0 top
R83 "10 kOhms" "RES 0603_1608" 19975.59,8833.82 r180 top
R84 "10 kOhms" "RES 0603_1608" 19975.59,8778.82 r180 top
R85 "10 kOhms" "RES 0603_1608" 19975.59,8723.82 r180 top
R86 "10 kOhms" "RES 0603_1608" 20427.23,9382.18 r0 top
R102 "10 Ohms" "RES 0603_1608" 15380.61,12107.11 r0 top
R103 "10 Ohms" "RES 0603_1608" 15275.61,12172.11 r0 top
R104 "22 Ohms" "RES 0402_1005" 15383.56,12177.11 r0 top
R105 "10 Ohms" "RES 0603_1608" 15661.79,11952.31 r0 top
R106 "10 kOhms" "RES 0603_1608" 14895,11413.23 r90 top
R107 "10 kOhms" "RES 0603_1608" 14640,10763.82 r0 top
R109 "10 kOhms" "RES 0603_1608" 14840,11413.23 r270 top
R125 "500 mOhms" "RES 0603_1608" 20734.02,13170 r180 top
R126 "" "RES 0603_1608" 21169.61,12930 r0 top value="1 kOhms"
R127 "1 kOhms" "RES 0603_1608" 21170,13040 r0 top
R128 "51 kOhms" "RES 0603_1608" 21169.61,13100 r180 top
R129 "330 kOhms" "RES 0603_1608" 21329.61,13040 r180 top
R130 "220 kOhms" "RES 0603_1608" 21329.61,12980 r180 top
R131 "51 kOhms" "RES 0603_1608" 21329.61,12920 r180 top
R132 "100 Ohms" "RES 0402_1005" 19942.64,13140 r0 top
R133 "10 kOhms" "RES 0603_1608" 21329.61,13100 r0 top
R134 "10 kOhms" "RES 0603_1608" 21328.42,12860 r0 top
R135 "=Value" "RES 0603_1608" 19895.59,12770 r180 top
R136 "=Value" "RES 0603_1608" 19895.59,12670 r180 top
R137 "22 Ohms" "RES 0402_1005" 18122.64,10500 r0 bottom
R138 "100 Ohms" "RES 0402_1005" 18492.64,13140 r0 top
R139 "10 Ohms" "RES 0603_1608" 15065,12146.89 r90 top
R140 "22 Ohms" "RES 0402_1005" 15120,12149.17 r270 top
R141 "22 Ohms" "RES 0402_1005" 16760,12167.36 r90 bottom
R142 "22 Ohms" "RES 0402_1005" 16715,12167.36 r90 bottom
R143 "22 Ohms" "RES 0402_1005" 16670,12167.36 r90 bottom
R144 "22 Ohms" "RES 0402_1005" 16625,12167.36 r90 bottom
R145 "22 Ohms" "RES 0402_1005" 16580,12167.36 r90 bottom
R146 "22 Ohms" "RES 0402_1005" 16535,12167.36 r90 bottom
R147 "22 Ohms" "RES 0402_1005" 16490,12167.36 r90 bottom
R148 "22 Ohms" "RES 0402_1005" 16445,12167.36 r90 bottom
R149 "22 Ohms" "RES 0402_1005" 16400,12167.36 r90 bottom
R150 "22 Ohms" "RES 0402_1005" 16355,12167.36 r90 bottom
R151 "22 Ohms" "RES 0402_1005" 16315,12167.36 r90 bottom
R152 "22 Ohms" "RES 0402_1005" 16275,12167.36 r90 bottom
R153 "22 Ohms" "RES 0402_1005" 16230,12167.36 r90 bottom
R154 "22 Ohms" "RES 0402_1005" 16185,12167.36 r90 bottom
R155 "22 Ohms" "RES 0402_1005" 16140,12167.36 r90 bottom
R156 "22 Ohms" "RES 0402_1005" 16095,12167.36 r90 bottom
R157 "22 Ohms" "RES 0402_1005" 16050,12167.36 r90 bottom
R158 "22 Ohms" "RES 0402_1005" 16005,12167.36 r90 bottom
R159 "22 Ohms" "RES 0402_1005" 15960,12167.36 r90 bottom
R160 "22 Ohms" "RES 0402_1005" 15915,12167.36 r90 bottom
SW1 "Kailh" KAILH_UNI_MX_WS2812 19542.61,8913.12 r180 top
SW2 "Kailh" KAILH_UNI_MX_WS2812 20367.72,8913.12 r180 top
SW3 "Kailh" KAILH_UNI_MX_WS2812 21194.5,8913.12 r180 top
SW4 "Kailh" KAILH_UNI_MX_WS2812 15831.38,8913.12 r180 top
SW5 "Kailh" KAILH_UNI_MX_WS2812 17078.06,8913.12 r180 top
SW6 "Kailh" KAILH_UNI_MX_WS2812 18541.34,11160.81 r270 top
SW7 "Kailh" KAILH_UNI_MX_WS2812 18541.34,10178.22 r270 top
SW8 "Kailh" KAILH_UNI_MX_WS2812 14210.63,8915 r180 top
TP1 "UART4_TX" TESTPOINT_VIA#1 16450.09,10705.2 r90 bottom
TP2 "UART4_RX" TESTPOINT_VIA#2 16552.09,10701.2 r90 bottom
TP3 "SAI2_SCK" TESTPOINT 15875,10698.82 r0 bottom
TP4 "SAI2_FS" TESTPOINT 15875,10643.82 r0 bottom
TP5 "USER_DBG1" TESTPOINT 15887.31,11048.51 r180 bottom
TP6 "USER_DBG2" TESTPOINT 15887.31,10989.49 r180 bottom
TP7 "UART1_RX" TESTPOINT 15820,11033.82 r90 bottom
TP8 "UART1_TX" TESTPOINT 15845,10925 r90 bottom
TP9 "SOF" TESTPOINT_PAD 19925,12570 r270 top
TP10 "UART1_RX_boot" TESTPOINT_VIA#3 16480,11388.82 r90 top
TP11 "UART1_TX_boot" TESTPOINT_VIA#4 17141.46,11113.66 r90 top
TP12 "ToPower" TESTPOINT_PAD 18847.89,12700.05 r90 top
TP13 "ToPower" TESTPOINT_PAD 18949.81,12699.99 r90 top
TP14 "ToPower" TESTPOINT_PAD 18747.89,12700.05 r90 top
TP15 "ToBAT+" TESTPOINT_PAD 20130,13120 r90 top
TP16 "ToBAT-" TESTPOINT_PAD 20130,12980 r90 top
U1 "W9812G6KH-6" TSOP-54 16625,10005.91 r180 top
U2 "W9812G6KH-6" TSOP-54 16625,10005.91 r180 bottom
U3 "W9812G6KH-6" TSOP-54 15316.7,10001.77 r180 top
U4 "W9812G6KH-6" TSOP-54 15316.7,10001.77 r180 bottom
U5 "SN74LVC1G08DBVR" SOT95P280X145-5N#2 16557.4,11964.41 r90 top
U6 "H11L1" "SOIC254 DIP-6" 15725,12400 r180 top
U7 "SN74LVC1G08DBVR" SOT95P280X145-5N#2 16420,11964.41 r90 top
Y1 "24MHz" "NDK NX3225SA" 16085,10788.82 r270 top
Y2 "24MHz" "NDK NX3225SA" 14776.76,10784.63 r270 top
Y3 "ABS07-32.768KHZ-7-T" ABS07 16093.09,11050.2 r180 top

## Footprints (in the part's own frame and the unit in brackets; to place one, negate y for a bottom-side part, rotate by r counter-clockwise, add the part's x,y. Pads: shape width x height; smd on the part's side, far side on the other; paste and mask are expansions set on the pad)
317342480 [mm]
  rect 0.6x1.85 smd: 1(14.5,1.525) 3(13.5,1.525) 5(12.5,1.525) 7(11.5,1.525) 9(10.5,1.525) 11(9.5,1.525) 13(8.5,1.525) 15(7.5,1.525) 17(6.5,1.525) 19(5.5,1.525) 21(4.5,1.525) 23(3.5,1.525) 25(2.5,1.525) 27(1.5,1.525) 29(0.5,1.525) 31(-0.5,1.525) 33(-1.5,1.525) 35(-2.5,1.525) 37(-3.5,1.525) 39(-4.5,1.525) 41(-5.5,1.525) 43(-6.5,1.525) 45(-7.5,1.525) 47(-8.5,1.525) 49(-9.5,1.525) 51(-10.5,1.525) 53(-11.5,1.525) 55(-12.5,1.525) 57(-13.5,1.525) 59(-14.5,1.525)
  rect 0.6x1.65 smd: 2(14.5,-2.225) 4(13.5,-2.225) 6(12.5,-2.225) 8(11.5,-2.225) 10(10.5,-2.225) 12(9.5,-2.225) 14(8.5,-2.225) 16(7.5,-2.225) 18(6.5,-2.225) 20(5.5,-2.225) 22(4.5,-2.225) 24(3.5,-2.225) 26(2.5,-2.225) 28(1.5,-2.225) 30(0.5,-2.225) 32(-0.5,-2.225) 34(-1.5,-2.225) 36(-2.5,-2.225) 38(-3.5,-2.225) 40(-4.5,-2.225) 42(-5.5,-2.225) 44(-6.5,-2.225) 46(-7.5,-2.225) 48(-8.5,-2.225) 50(-9.5,-2.225) 52(-10.5,-2.225) 54(-11.5,-2.225) 56(-12.5,-2.225) 58(-13.5,-2.225) 60(-14.5,-2.225)
  rect 2x1.6 smd paste+0 mask+0.05: 31(-16.9,-0.35) 32(16.9,-0.35)
  silkscreen extent -18.54,-1.6 18.54,3.05, body extent -18.7,-2.68 18.7,2.17, height 5.68
2002112100008T4LF [mm]
  rect 0.76x2.4 smd: 1(-1.905,-1.95) 2(-1.905,1.95) 3(-0.635,-1.95) 4(-0.635,1.95) 5(0.635,-1.95) 6(0.635,1.95) 7(1.905,-1.95) 8(1.905,1.95)
  silkscreen extent -2.54,-3.7 2.54,0.4, body extent -2.53,-2.75 2.55,2.75, height 4.5
ABS07 [mm]
  rect 1.1x1.9 smd: 1(-1.25,0) 2(1.25,0)
  silkscreen extent -0.4,-0.75 0.4,0.75, body extent -1.6,-0.75 1.6,0.75, height 0.9
AFA11-S12GLA-00 [mm]
  rect 0.6x1.75 smd paste+0 mask+0.05: 1(0,0) 2(1,3.75) 3(2,0) 4(3,3.75) 5(4,0) 6(5,3.75) 7(6,0) 8(7,3.75) 9(8,0) 10(9,3.75) 11(10,0) 12(11,3.75)
  rect 2x1.6 smd paste+0 mask+0.05: 13(13.4,1.875) 14(-2.4,1.875)
  silkscreen extent -4.04,-0.66 15.04,3.13, body extent -3.69,-0.34 14.71,4.16, height 5.35
"BOURNS SRR6028" [mm] "Precision Wire Wound Inductor, 2-Leads, Body 6.80x6.80mm, IPC Medium Density"
  rect 0.5x7 smd: 1(-3.15,0) 2(3.15,0)
  Top Layer 1 region: 3.6,3.6 1.1,3.6 1.1,2.5 1.4,2.4 1.7,2.1 1.9,2 2.1,1.7 2.3,1.4 2.5,1 2.6,0.7 2.7,0.3 2.7,0 3.6,0
  Top Layer 1 region: 3.6,-3.6 1.1,-3.6 1.1,-2.5 1.4,-2.4 1.7,-2.1 1.9,-2 2.1,-1.7 2.3,-1.4 2.5,-1 2.6,-0.7 2.7,-0.3 2.7,0 3.6,0
  Top Layer 1 region: -3.6,-3.6 -1.1,-3.6 -1.1,-2.5 -1.4,-2.4 -1.7,-2.1 -1.9,-2 -2.1,-1.7 -2.3,-1.4 -2.5,-1 -2.6,-0.7 -2.7,-0.3 -2.7,0 -3.6,0
  Top Layer 1 region: -3.6,3.6 -1.1,3.6 -1.1,2.5 -1.4,2.4 -1.7,2.1 -1.9,2 -2.1,1.7 -2.3,1.4 -2.5,1 -2.6,0.7 -2.7,0.3 -2.7,0 -3.6,0
  Top Layer 1 lines w0.1: 1.1,3.55 1.1,2.5 cw(c0,0) 2.731,0 cw(c0,0) 1.1,-2.5 1.1,-3.55 ; -1.1,3.55 -1.1,2.5 ccw(c0,0) -2.731,0 ccw(c0,0) -1.1,-2.5 -1.1,-3.55
  silkscreen extent -0.4,-3.5 0.4,3.5, body extent -3.4,-3.4 3.4,3.4, height 2.8
"CAP 0402_1005" [mm] "Chip Capacitor, 2-Leads, Body 1.02x0.51mm, IPC Medium Density"
  rect 0.6x0.64 smd: 1(-0.44,0) 2(0.44,0)
  silkscreen extent -1,-0.5 1,0.5, body extent -0.5,-0.26 0.5,0.26, height 0.52
"CAP 0603_1608" [mm] "Chip Capacitor, 2-Leads, Body 1.60x0.80mm, IPC Medium Density"
  rect 0.9x1 smd: 1(-0.675,0) 2(0.675,0)
  silkscreen extent -1.4,-0.7 1.4,0.7, body extent -0.8,-0.41 0.8,0.41, height 0.82
"CAP 0805_2012" [mm] "Chip Capacitor, 2-Leads, Body 2.00x1.20mm, IPC Medium Density"
  rect 1.3x1.4 smd: 1(-0.8,0) 2(0.8,0)
  silkscreen extent -1.7,-0.9 1.7,0.9, body extent -1,-0.64 1,0.64, height 1.26
"CON: JUMPER x2"#1 [mm]
  rect 0.5x1 smd: 1(-0.35,1.4) 2(0.35,1.4) 3(-0.35,0) 4(0.35,0)
  silkscreen extent -0.8,-0.7 0.8,2.1
"CON: JUMPER x2"#2 [mm]
  rect 0.5x1 smd mask+0.102: 1(-0.35,1.4) 2(0.35,1.4) 3(-0.35,0) 4(0.35,0)
  silkscreen extent -0.8,-0.7 0.8,2.1
"CON: JUMPER x2"#3 [mm]
  rect 0.5x1 smd: 1(-0.35,-1.4) 2(0.35,-1.4) 3(-0.35,0) 4(0.35,0)
  silkscreen extent -0.8,-2.1 0.8,0.7
DIN5 [mil] "PCB mount"
  oval 90x110 hole 55: 1(315,-198) 2(0,-200) 3(-315,-198) 4(200,-275) 5(-200,-275) 6(-100,200) 6(97.5,197.5)
  Top Layer 1 lines w5: 400,285 398,287 ; -398,287 -400,285
  silkscreen extent -400,-175 400,287, body extent -398,-299 398,290, height 815
"DIODES SOT-23-3" [mm] "SOT23, 3-Leads, Body 2.90x2.40mm, Pitch 0.95mm, IPC Medium Density"
  rect 0.9x0.8 smd: 1(-1,0.95) 2(-1,-0.95) 3(1,0)
  silkscreen extent -0.7,-1.45 0.7,1.45, body extent -1.41,-1.45 1.41,1.45, height 1.5
"DO214AA SMB" [mm] "Molded Diode, 2-Leads, Body 4.31x3.62mm, IPC Medium Density"
  rect 2.45x2.15 smd: 1(-2.15,0) 2(2.15,0)
  silkscreen extent -3.6,-1.8 3.8,1.8, body extent -2.6,-1.8 2.6,1.8, height 2.4
EC11_15mm [mm]
  round 1.8 hole 1.2: 1(-2.5,7) 2(2.5,7) A(-2.5,-7.5) B(2.5,-7.5) C(0,-7.5)
  oval 2.4x3.8 hole 1.4 slot 2.8 at 90 deg: MT1(-5.7,0) MT2(5.7,0)
  silkscreen extent -6.25,-6.7 6.25,6.7, body extent -6,-7.67 6,7.25, height 21.9
"FER 0805_2012" [mm] "Chip Ferrite, 2-Leads, Body 2.00x1.20mm, IPC Medium Density"
  rect 1.3x1.4 smd: 1(-0.8,0) 2(0.8,0)
  silkscreen extent -1.7,-0.9 1.7,0.9, body extent -1,-0.64 1,0.64, height 1.26
FFC_50_DBG [mm]
  rect 0.3x2.6 smd: 1(-8.5,2.25) 2(-8,2.25) 3(-7.5,2.25) 4(-7,2.25) 5(-6.5,2.25) 6(-6,2.25) 7(-5.5,2.25) 8(-5,2.25) 9(-4.5,2.25) 10(-4,2.25) 11(-3.5,2.25) 12(-3,2.25) 13(-2.5,2.25) 14(-2,2.25) 15(-1.5,2.25) 16(-1,2.25) 17(-0.5,2.25) 18(0,2.25) 19(0.5,2.25) 20(1,2.25) 21(1.5,2.25) 22(2,2.25) 23(2.5,2.25) 24(3,2.25) 25(3.5,2.25) 26(4,2.25) 27(4.5,2.25) 28(5,2.25) 29(5.5,2.25) 30(6,2.25) 31(6.5,2.25) 32(7,2.25) 33(7.5,2.25) 34(8,2.25) 35(8.5,2.25) 36(9,2.25) 37(9.5,2.25) 38(10,2.25) 39(10.5,2.25) 40(11,2.25) 41(11.5,2.25) 42(12,2.25) 43(12.5,2.25) 44(13,2.25) 45(13.5,2.25) 46(14,2.25) 47(14.5,2.25) 48(15,2.25) 49(15.5,2.25) 50(16,2.25)
  rect 2.65x3.5 smd: MP1(-10.312,0.356) MP1(17.812,0.356)
  silkscreen extent -11.5,-2.29 17.35,4.01, body extent -11.49,-2.32 19.01,3.32, height 2.06
header-6_female [mil]
  round 65 hole 30: 1(0,0) 2(100,0) 3(200,0) 4(300,0) 5(400,0) 6(500,0)
  silkscreen extent -65,-50 565,50, body extent -66,-50 566,50, height 335
header-6_male [mil]
  round 65 hole 30: 1(0,0) 2(100,0) 3(200,0) 4(300,0) 5(400,0) 6(500,0)
  silkscreen extent -50,-50 550,50, body extent -50,-50 550,50, height 339
Hole_2.5mm#1 [mm]
  round 2.5 hole 2: 0(0,0)
  body extent -0.5,-0.5 0.5,0.5, height 0.5
Hole_2.5mm#2 [mm]
  round 2.5 hole 2: ""(0,0)
  body extent -0.5,-0.5 0.5,0.5, height 0.5
"HRO_TYPE-C-31-M-12 - REZONIT" [mm]
  rect 0.6x1.45 smd: A1B12(-3.25,5.095) A4B9(-2.45,5.095) B1A12(3.25,5.095) B4A9(2.45,5.095)
  rect 0.3x1.45 smd: A5(-1.25,5.095) A6(-0.25,5.095) A7(0.25,5.095) A8(1.25,5.095) B5(1.75,5.095) B6(0.75,5.095) B7(-0.75,5.095) B8(-1.75,5.095)
  oval 1.05x2.1 hole 0.6 slot 1.75 at 90 deg: S1(-4.32,4.18) S2(4.32,4.18)
  oval 1.05x2.1 hole 0.6 slot 1.5 at 90 deg: S3(-4.32,0) S4(4.32,0)
  round 0.7 hole 0.7 unplated: ""(-2.89,3.65) ""(2.89,3.65)
  silkscreen extent -4.47,-2.6 4.47,6.5, body extent -4.47,-2.6 4.47,5.31, height 3.31
KAILH_UNI_MX_WS2812 [mm] "Universal footprint for low-profile and regular switches, direct solder. Kailh RGB Black also supported without led, LED is ws2812 in 2020 package"
  rect 0.9x0.7 smd: 1(0.815,-5.174) 2(0.815,-4.074) 3(-1.015,-4.074) 4(-1.015,-5.174)
  round 2.1 hole 1.3: S1(-3.81,2.54) S2(2.54,5.08)
  oval 2.1x1.8 hole 1.3: S1(5,3.8) S1(5,5.9) S2(0,5.9) S2(0,3.8)
  oval 2.2x1.7 hole 1.7 slot 2.2 at 0 deg unplated paste-2539.97: ""(-5.29,0) ""(5.29,0)
  round 3.98 hole 3.98 unplated paste-2539.97: ""(0,0)
  silkscreen extent -1.1,-5.77 1.2,-3.52, body extent -7.5,-7.5 7.5,7.5, height 8.2
"LED 0805_2012 RED" [mm] "Chip Diode, 2-Leads, Body 2.00x1.25mm, IPC Medium Density"
  rect 1.2x1.2 smd: 1(-1.05,0) 2(1.05,0)
  silkscreen extent -2.03,-0.9 2.03,0.9, body extent -1,-0.62 1,0.63, height 0.9
"NDK NX3225SA" [mm] "Crystal, 4-Leads, Body 2.50x3.20mm, Pitch 2.20mm, IPC Medium Density"
  rect 1.4x1.2 smd: 1(-1.1,-0.8) 2(1.1,-0.8) 3(1.1,0.8) 4(-1.1,0.8)
  silkscreen extent -2.25,-1.85 2.1,1.7, body extent -1.61,-1.26 1.61,1.26, height 0.6
PJ-625CK [mm] "HOOYA PJ-625CK"
  oval 3x1.6 hole 1.1 slot 2.4 at 0 deg: 2(-7.974,-5.7) 3(-7.974,5.7) 4(-1.624,-5.7) 5(-1.624,5.7) 6(4.726,-5.7) 7(4.726,5.7)
  oval 1.6x3 hole 1.1 slot 2.4 at 90 deg: 22(-4.725,-6.4) 23(-4.725,6.4) 24(1.625,-6.4) 25(1.625,6.4) 26(7.975,-6.4) 27(7.975,6.4)
  silkscreen extent -21.52,-8 11.63,8, body extent -21.4,-7.93 11.75,8.07, height 32
POT [mm]
  round 1.8 hole 1.1: 1(-2.5,-5.704) 2(0,-5.704) 3(2.5,-5.704)
  oval 2.4x3.8 hole 1.4 slot 2.8 at 90 deg: MT1(-4.826,1.778) MT1(4.826,1.778)
  silkscreen extent -5.08,-5.76 5.08,6.81, body extent -5.64,-5.73 5.64,6.92, height 21.1
QFP50P2200X2200X160-144N [mm]
  rect 1.475x0.3 smd mask+0.102: 1(-10.738,8.75) 2(-10.738,8.25) 3(-10.738,7.75) 4(-10.738,7.25) 5(-10.738,6.75) 6(-10.738,6.25) 7(-10.738,5.75) 8(-10.738,5.25) 9(-10.738,4.75) 10(-10.738,4.25) 11(-10.738,3.75) 12(-10.738,3.25) 13(-10.738,2.75) 14(-10.738,2.25) 15(-10.738,1.75) 16(-10.738,1.25) 17(-10.738,0.75) 18(-10.738,0.25) 19(-10.738,-0.25) 20(-10.738,-0.75) 21(-10.738,-1.25) 22(-10.738,-1.75) 23(-10.738,-2.25) 24(-10.738,-2.75) 25(-10.738,-3.25) 26(-10.738,-3.75) 27(-10.738,-4.25) 28(-10.738,-4.75) 29(-10.738,-5.25) 30(-10.738,-5.75) 31(-10.738,-6.25) 32(-10.738,-6.75) 33(-10.738,-7.25) 34(-10.738,-7.75) 35(-10.738,-8.25) 36(-10.738,-8.75) 73(10.738,-8.75) 74(10.738,-8.25) 75(10.738,-7.75) 76(10.738,-7.25) 77(10.738,-6.75) 78(10.738,-6.25) 79(10.738,-5.75) 80(10.738,-5.25) 81(10.738,-4.75) 82(10.738,-4.25) 83(10.738,-3.75) 84(10.738,-3.25) 85(10.738,-2.75) 86(10.738,-2.25) 87(10.738,-1.75) 88(10.738,-1.25) 89(10.738,-0.75) 90(10.738,-0.25) 91(10.738,0.25) 92(10.738,0.75) 93(10.738,1.25) 94(10.738,1.75) 95(10.738,2.25) 96(10.738,2.75) 97(10.738,3.25) 98(10.738,3.75) 99(10.738,4.25) 100(10.738,4.75) 101(10.738,5.25) 102(10.738,5.75) 103(10.738,6.25) 104(10.738,6.75) 105(10.738,7.25) 106(10.738,7.75) 107(10.738,8.25) 108(10.738,8.75)
  rect 0.3x1.475 smd mask+0.102: 37(-8.75,-10.738) 38(-8.25,-10.738) 39(-7.75,-10.738) 40(-7.25,-10.738) 41(-6.75,-10.738) 42(-6.25,-10.738) 43(-5.75,-10.738) 44(-5.25,-10.738) 45(-4.75,-10.738) 46(-4.25,-10.738) 47(-3.75,-10.738) 48(-3.25,-10.738) 49(-2.75,-10.738) 50(-2.25,-10.738) 51(-1.75,-10.738) 52(-1.25,-10.738) 53(-0.75,-10.738) 54(-0.25,-10.738) 55(0.25,-10.738) 56(0.75,-10.738) 57(1.25,-10.738) 58(1.75,-10.738) 59(2.25,-10.738) 60(2.75,-10.738) 61(3.25,-10.738) 62(3.75,-10.738) 63(4.25,-10.738) 64(4.75,-10.738) 65(5.25,-10.738) 66(5.75,-10.738) 67(6.25,-10.738) 68(6.75,-10.738) 69(7.25,-10.738) 70(7.75,-10.738) 71(8.25,-10.738) 72(8.75,-10.738) 109(8.75,10.738) 110(8.25,10.738) 111(7.75,10.738) 112(7.25,10.738) 113(6.75,10.738) 114(6.25,10.738) 115(5.75,10.738) 116(5.25,10.738) 117(4.75,10.738) 118(4.25,10.738) 119(3.75,10.738) 120(3.25,10.738) 121(2.75,10.738) 122(2.25,10.738) 123(1.75,10.738) 124(1.25,10.738) 125(0.75,10.738) 126(0.25,10.738) 127(-0.25,10.738) 128(-0.75,10.738) 129(-1.25,10.738) 130(-1.75,10.738) 131(-2.25,10.738) 132(-2.75,10.738) 133(-3.25,10.738) 134(-3.75,10.738) 135(-4.25,10.738) 136(-4.75,10.738) 137(-5.25,10.738) 138(-5.75,10.738) 139(-6.25,10.738) 140(-6.75,10.738) 141(-7.25,10.738) 142(-7.75,10.738) 143(-8.25,10.738) 144(-8.75,10.738)
  silkscreen extent -11.35,-9.65 9.65,9.65, body extent -11,-11 11,11, height 1.6
"RES 0402_1005" [mm] "Chip Resistor, 2-Leads, Body 1.0x0.5mm, IPC Medium Density"
  rect 0.75x0.6 smd: 1(-0.575,0) 2(0.575,0)
  silkscreen extent -1.14,-0.51 1.14,0.51, body extent -0.5,-0.25 0.5,0.25, height 0.35
"RES 0603_1608" [mm] "Chip Resistor, 2-Leads, Body 1.60x0.80mm, IPC Medium Density"
  rect 0.85x0.95 smd: 1(-0.65,0) 2(0.65,0)
  silkscreen extent -1.27,-0.7 1.27,0.7, body extent -0.8,-0.4 0.8,0.4, height 0.45
"RESNET 1206-8 CONVEX" [mm] "4 resistor 3.20x1.60mm, 0.7mm high"
  rect 0.9x0.45 smd: 1(-0.85,1.2) 2(-0.85,0.4) 3(-0.85,-0.4) 4(-0.85,-1.2) 5(0.85,-1.2) 6(0.85,-0.4) 7(0.85,0.4) 8(0.85,1.2)
  silkscreen extent -1.6,-1.73 1.6,1.73, body extent -0.84,-1.62 0.84,1.63, height 0.71
SOD-123 [mm] "SOD, 2-Leads, Body 1.55x3.70mm, IPC Medium Density"
  rect 0.9x0.95 smd: 1(-1.575,0) 2(1.575,0)
  silkscreen extent -2.3,-0.92 2.41,0.92, body extent -1.86,-0.78 1.86,0.77, height 1.35
SOIC127P600X165-9N [mm]
  rect 1.525x0.7 smd: 1(-2.712,1.905) 2(-2.712,0.635) 3(-2.712,-0.635) 4(-2.712,-1.905) 5(2.712,-1.905) 6(2.712,-0.635) 7(2.712,0.635) 8(2.712,1.905)
  rect 2.09x2.09 smd: 9(0,0)
  silkscreen extent -3.47,2.61 -1.95,2.61, body extent -3,-2.45 3,2.45, height 1.65
SOIC127P600X175-8N [mm]
  rect 1.525x0.65 smd: 1(-2.712,1.905) 2(-2.712,0.635) 3(-2.712,-0.635) 4(-2.712,-1.905) 5(2.712,-1.905) 6(2.712,-0.635) 7(2.712,0.635) 8(2.712,1.905)
  silkscreen extent -3.47,-2.45 1.6,2.58, body extent -3,-2.45 3,2.45, height 1.75
SOIC127P600X175-14N [mm]
  rect 1.55x0.65 smd: 1(-2.725,3.81) 2(-2.725,2.54) 3(-2.725,1.27) 4(-2.725,0) 5(-2.725,-1.27) 6(-2.725,-2.54) 7(-2.725,-3.81) 8(2.725,-3.81) 9(2.725,-2.54) 10(2.725,-1.27) 11(2.725,0) 12(2.725,1.27) 13(2.725,2.54) 14(2.725,3.81)
  silkscreen extent -3.5,-4.33 1.6,4.48, body extent -3,-4.33 3,4.33, height 1.75
SOIC127P600X175-16N [mm]
  rect 1.55x0.65 smd: 1(-2.725,4.445) 2(-2.725,3.175) 3(-2.725,1.905) 4(-2.725,0.635) 5(-2.725,-0.635) 6(-2.725,-1.905) 7(-2.725,-3.175) 8(-2.725,-4.445) 9(2.725,-4.445) 10(2.725,-3.175) 11(2.725,-1.905) 12(2.725,-0.635) 13(2.725,0.635) 14(2.725,1.905) 15(2.725,3.175) 16(2.725,4.445)
  silkscreen extent -3.5,-5.1 1.6,5.12, body extent -3,-5.1 3,5.1, height 1.75
SOIC127P790X216-8N [mm]
  rect 1.65x0.65 smd: 1(-3.6,1.905) 2(-3.6,0.635) 3(-3.6,-0.635) 4(-3.6,-1.905) 5(3.6,-1.905) 6(3.6,-0.635) 7(3.6,0.635) 8(3.6,1.905)
  silkscreen extent -4.43,-2.64 2.42,2.64, body extent -3.95,-2.64 3.95,2.64, height 2.16
"SOIC254 DIP-6" [mm]
  rect 1.7x1.45 smd: 1(-4.7,2.54) 2(-4.7,0) 3(-4.7,-2.54) 4(4.7,-2.54) 5(4.7,0) 6(4.7,2.54)
  silkscreen extent -4.8,-4.5 3.52,4.5, body extent -5.17,-4.33 5.13,4.3, height 4.6
SOP65P640X120-20N [mm]
  rect 1.475x0.45 smd: 1(-2.938,2.925) 2(-2.938,2.275) 3(-2.938,1.625) 4(-2.938,0.975) 5(-2.938,0.325) 6(-2.938,-0.325) 7(-2.938,-0.975) 8(-2.938,-1.625) 9(-2.938,-2.275) 10(-2.938,-2.925) 11(2.938,-2.925) 12(2.938,-2.275) 13(2.938,-1.625) 14(2.938,-0.975) 15(2.938,-0.325) 16(2.938,0.325) 17(2.938,0.975) 18(2.938,1.625) 19(2.938,2.275) 20(2.938,2.925)
  silkscreen extent -3.67,-3.25 1.85,3.5, body extent -3.2,-3.25 3.2,3.25, height 1.13
SOT95P280X145-5N#1 [mm]
  rect 1.2x0.6 smd: 1(-1.25,0.95) 2(-1.25,0) 3(-1.25,-0.95) 4(1.25,-0.95) 5(1.25,0.95)
  silkscreen extent -1.85,-1.45 0.3,1.5, body extent -1.4,-1.45 1.4,1.45, height 1.2
SOT95P280X145-5N#2 [mm]
  rrect50% 1.21x0.59 smd: 1(-1.255,0.95) 2(-1.255,0) 3(-1.255,-0.95) 4(1.255,-0.95) 5(1.255,0.95)
  silkscreen extent -2.51,-1.45 0.8,1.45, body extent -1.4,-1.45 1.4,1.45, height 1.45
SOT95P280X145-6N [mm]
  rect 1.2x0.6 smd: 1(-1.25,0.95) 2(-1.25,0) 3(-1.25,-0.95) 4(1.25,-0.95) 5(1.25,0) 6(1.25,0.95)
  silkscreen extent -1.85,-1.45 0.3,1.6, body extent -1.4,-1.45 1.4,1.45, height 1.45
SOT-23 [mil]
  rect 52x22 smd: 1(-40,36) 2(-40,-36) 3(40,0)
  silkscreen extent -9,-59 28,59, body extent -60,-61 58,61, height 57
SOT-223 [mm]
  rect 1.3x0.95 smd: 1(-3.35,2.29) 2(-3.35,0) 3(-3.35,-2.29)
  rect 1.3x3.25 smd: 4(3.35,0)
  silkscreen extent -4,-3.25 1.75,3.25, body extent -3.5,-3.25 3.5,3.25, height 1.8
TESTPOINT [mil]
  round 39.37 / inner round 0 / far side round 0 all layers, no hole mask+1.98: 1(0,0)
TESTPOINT_PAD [mm]
  rect 1.5x1.5 hole 1: 1(0,0)
TESTPOINT_VIA#1 [mil]
  round 39.37 / inner round 20 / far side round 20 all layers, no hole mask+4: 1(0,0)
TESTPOINT_VIA#2 [mil]
  round 39.37 / inner round 0 / far side round 0 all layers, no hole mask+4: 1(0,0)
TESTPOINT_VIA#3 [mil]
  round 39.37 / inner round 39.37 / far side round 0 all layers, no hole mask+4: 1(0,0)
TESTPOINT_VIA#4 [mil]
  round 39.37 / inner round 15.75 / far side round 15.75 all layers, no hole mask+4: 1(0,0)
TO228P972X240-3N [mm]
  rect 2.1x1 smd: 1(-4.35,2.28) 3(-4.35,-2.28)
  rect 5.85x4.9 smd: 4(2.45,0)
  silkscreen extent -5.27,-3.25 -0.85,3.42, body extent -4.97,-3.3 4.56,3.3, height 2.3
TSOP-54 [mil]
  rect 20x90 smd: 1(-409.45,-230.32) 2(-377.95,-230.32) 3(-346.46,-230.32) 4(-314.96,-230.32) 5(-283.46,-230.32) 6(-251.97,-230.32) 7(-220.47,-230.32) 8(-188.98,-230.32) 9(-157.48,-230.32) 10(-125.98,-230.32) 11(-94.49,-230.32) 12(-62.99,-230.32) 13(-31.5,-230.32) 14(0,-230.32) 15(31.5,-230.32) 16(62.99,-230.32) 17(94.49,-230.32) 18(125.98,-230.32) 19(157.48,-230.32) 20(188.98,-230.32) 21(220.47,-230.32) 22(251.97,-230.32) 23(283.46,-230.32) 24(314.96,-230.32) 25(346.46,-230.32) 26(377.95,-230.32) 27(409.45,-230.32) 28(409.45,230.31) 29(377.95,230.31) 30(346.46,230.31) 31(314.96,230.31) 32(283.46,230.31) 33(251.97,230.31) 34(220.47,230.31) 35(188.98,230.31) 36(157.48,230.31) 37(125.98,230.31) 38(94.49,230.31) 39(62.99,230.31) 40(31.5,230.31) 41(0,230.31) 42(-31.5,230.31) 43(-62.99,230.31) 44(-94.49,230.31) 45(-125.98,230.31) 46(-157.48,230.31) 47(-188.98,230.31) 48(-220.47,230.31) 49(-251.97,230.31) 50(-283.46,230.31) 51(-314.96,230.31) 52(-346.46,230.31) 53(-377.95,230.31) 54(-409.45,230.31)
  silkscreen extent -433,-197 433,197, body extent -443,-230 443,226, height 55